# EAGLE board OLED Display-Panel (EAGLE 9.6.2), part 1 of 4
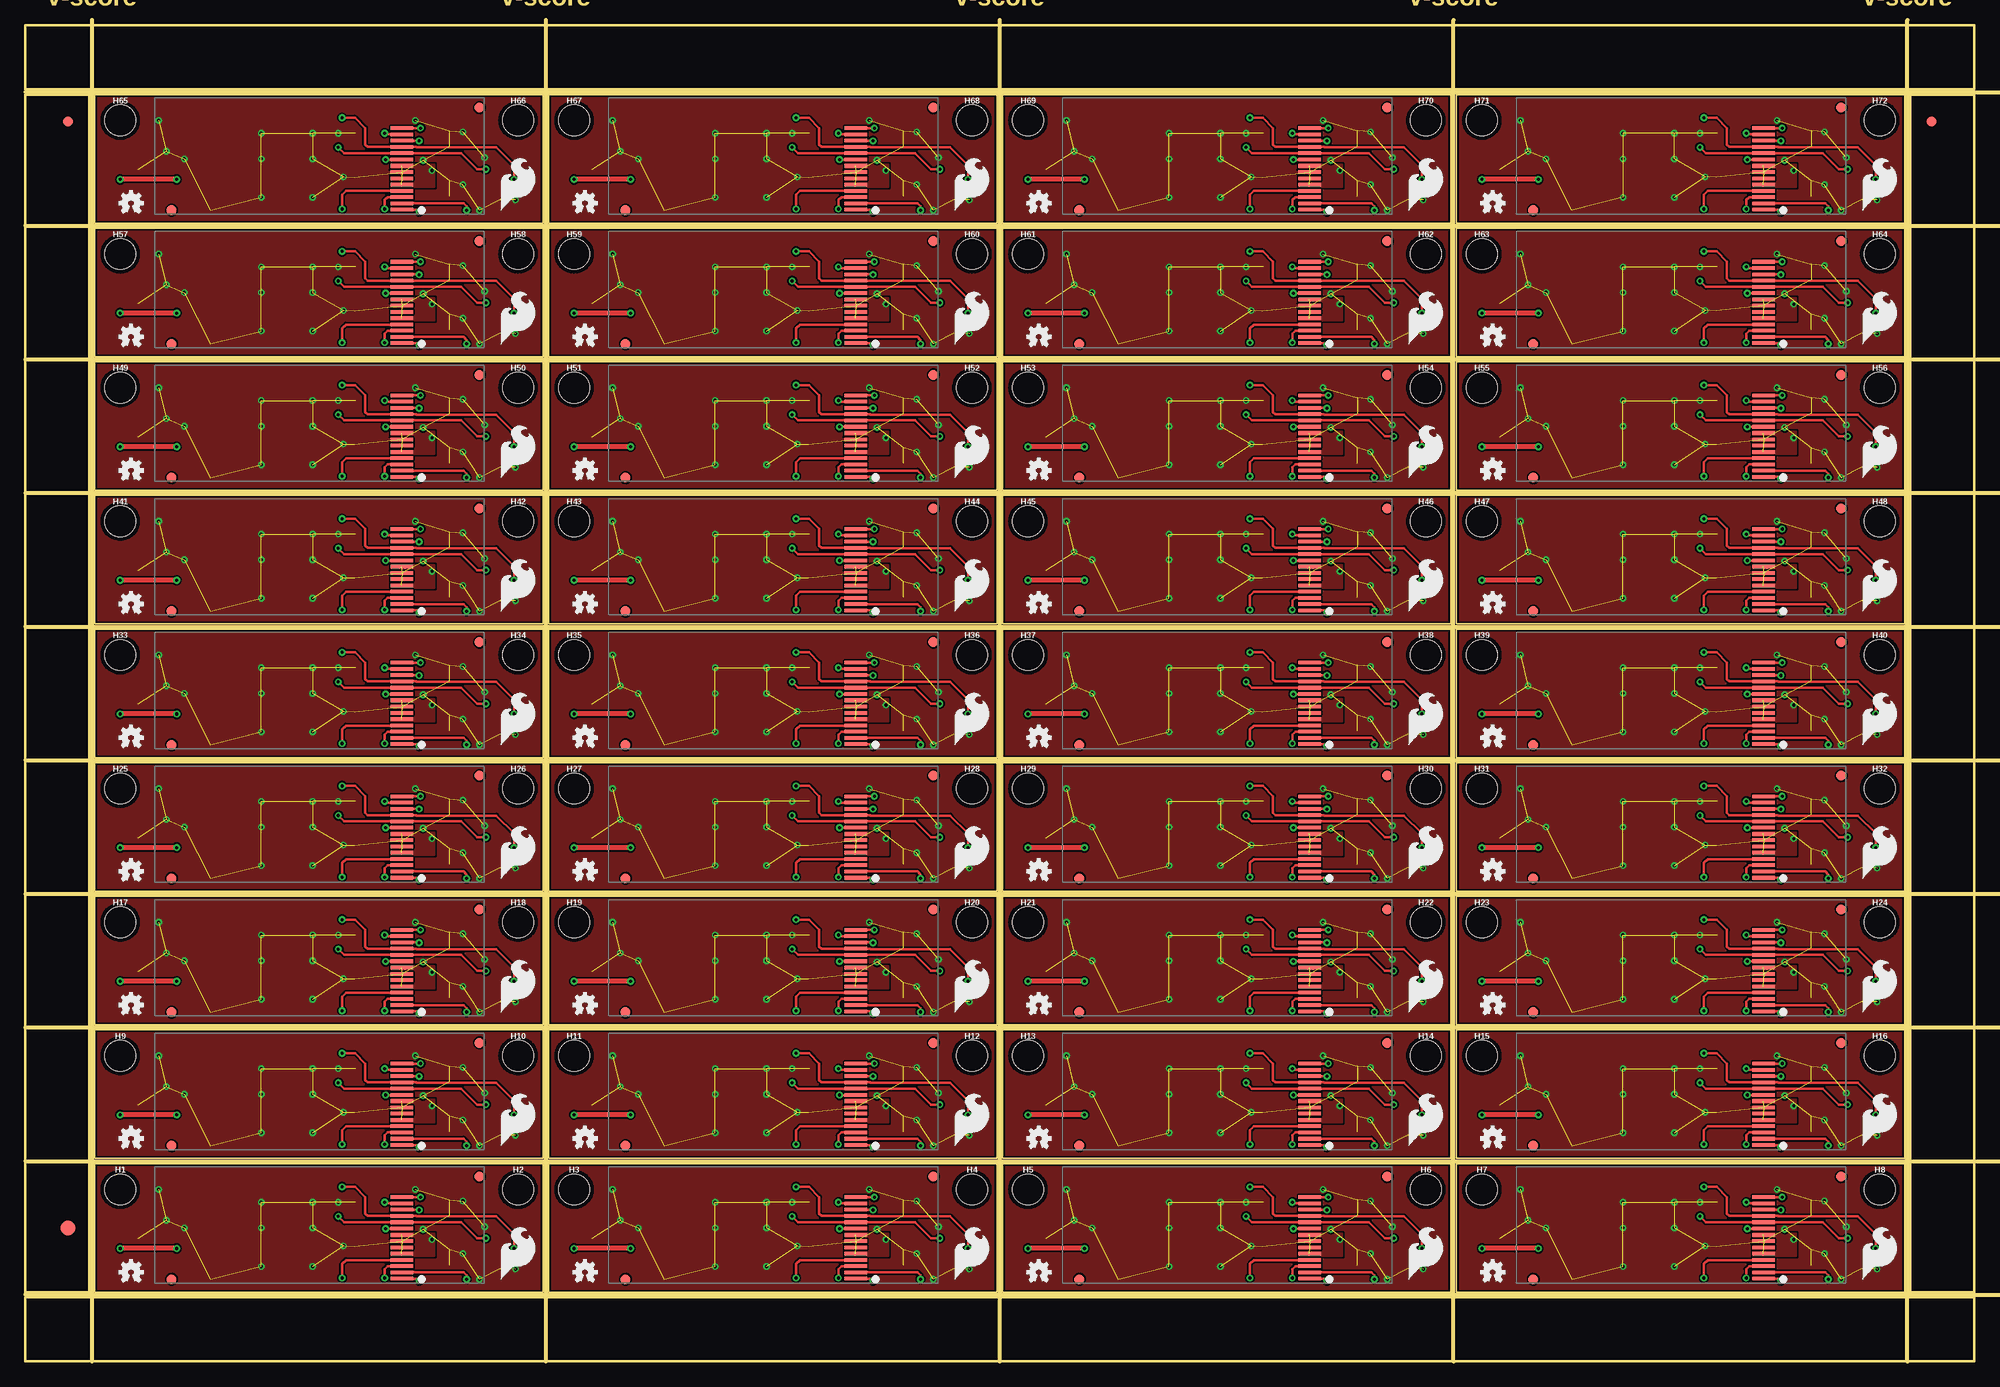
[diagram p0: board, top side]
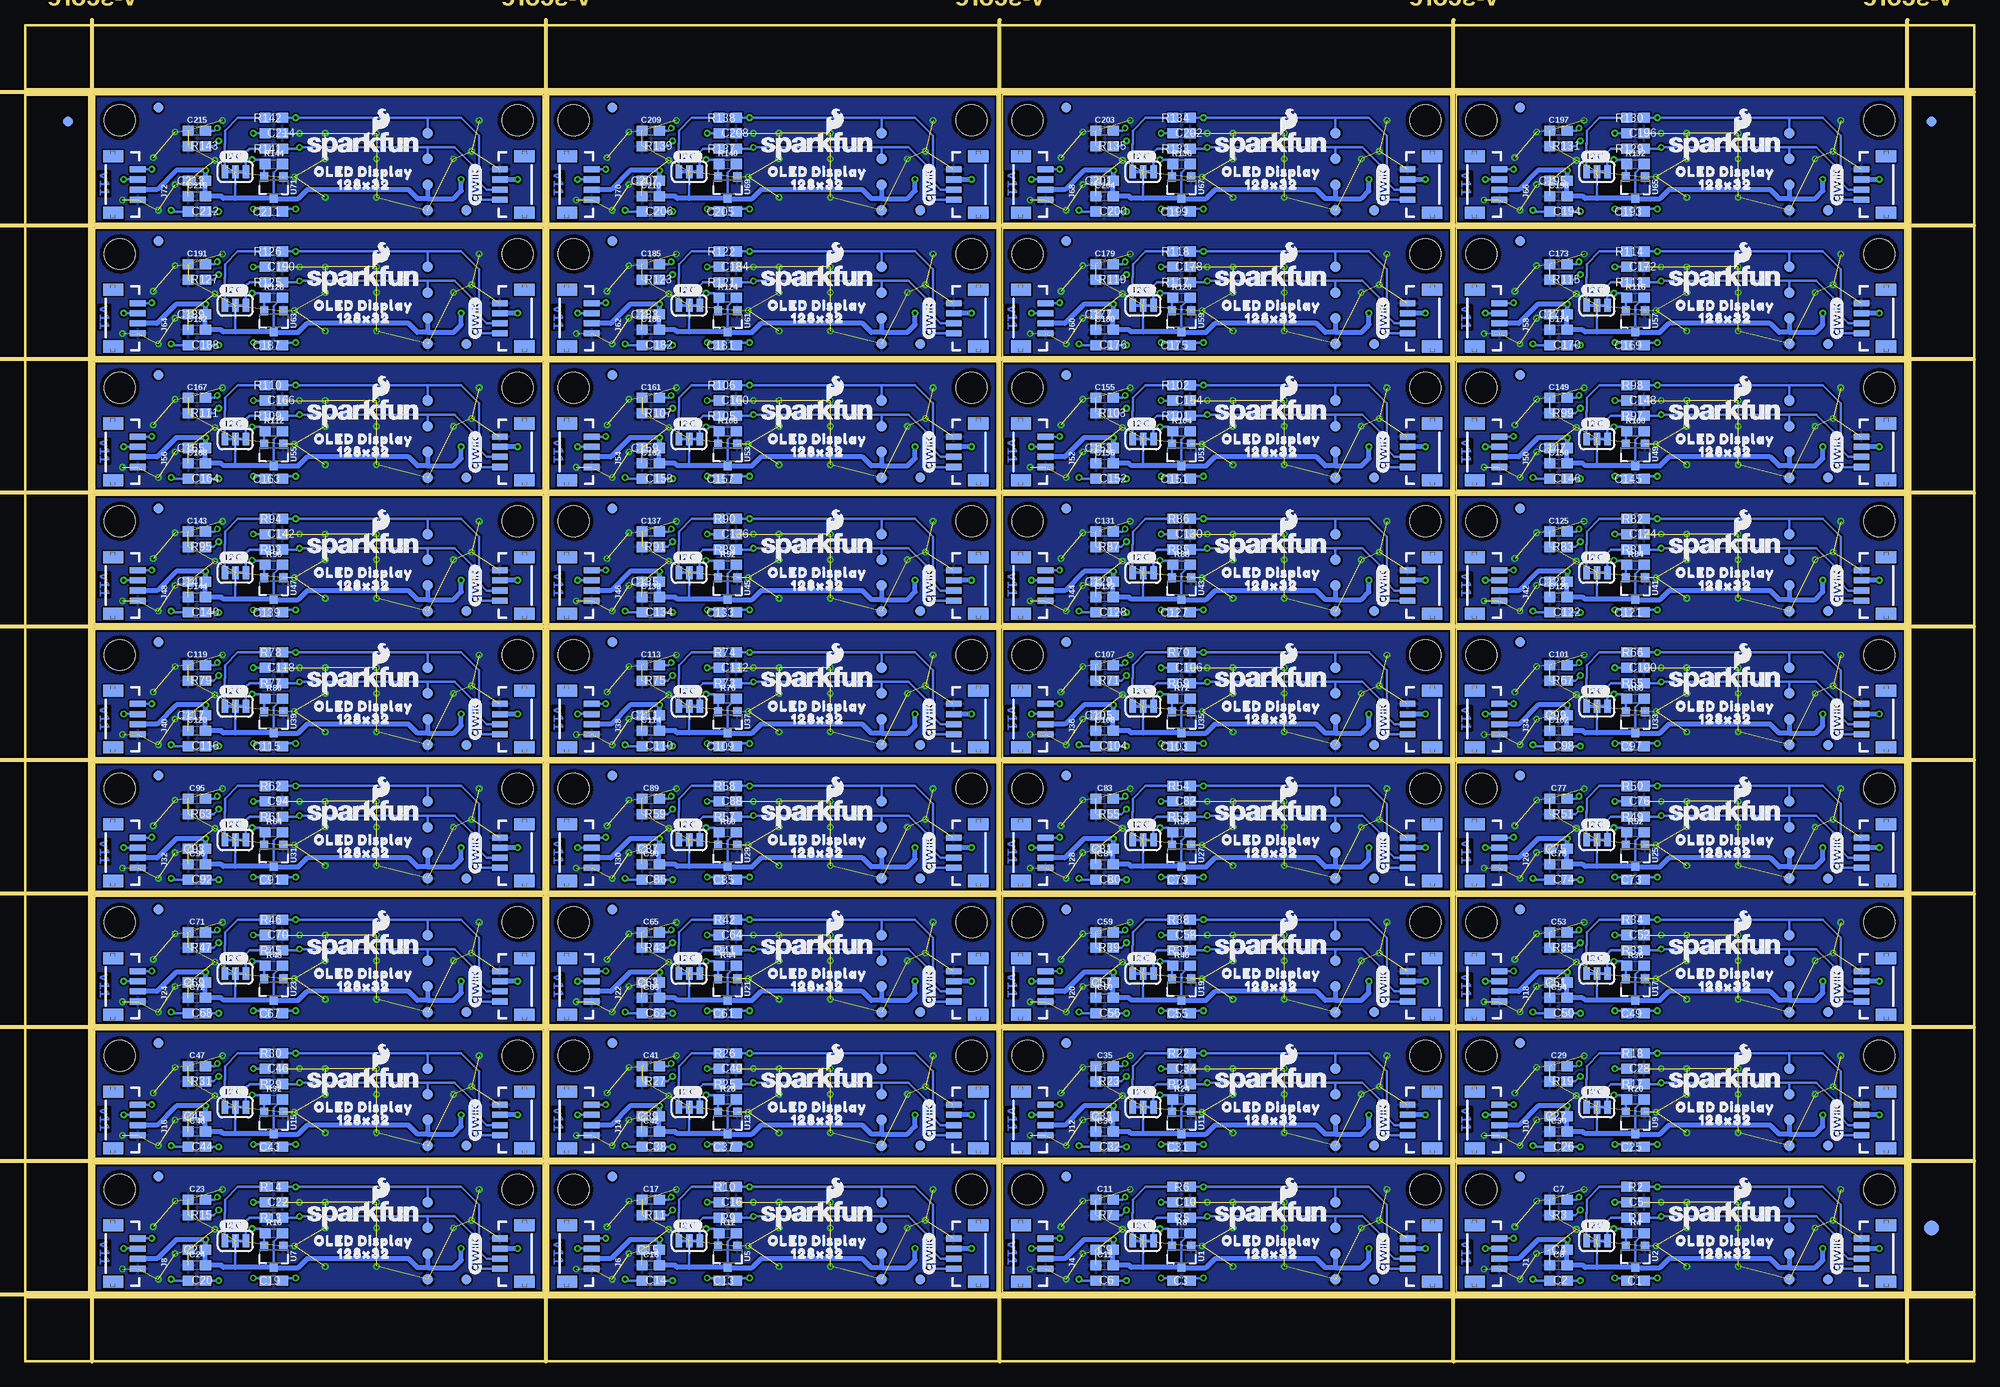
[diagram p1: board, bottom side, seen from below]

Size 192.89 x 132.21 mm. Coordinates in mm from the lower left corner, seen from the top.
Outline: 6.86,6.86 51.27,6.86 51.27,19.57 6.86,19.57 6.86,6.86
Outline: 51.78,6.86 96.19,6.86 96.19,19.57 51.78,19.57 51.78,6.86
Outline: 96.7,6.86 141.11,6.86 141.11,19.57 96.7,19.57 96.7,6.86
Outline: 141.62,6.86 186.03,6.86 186.03,19.57 141.62,19.57 141.62,6.86
Outline: 6.86,20.08 51.27,20.08 51.27,32.8 6.86,32.8 6.86,20.08
Outline: 51.78,20.08 96.19,20.08 96.19,32.8 51.78,32.8 51.78,20.08
Outline: 96.7,20.08 141.11,20.08 141.11,32.8 96.7,32.8 96.7,20.08
Outline: 141.62,20.08 186.03,20.08 186.03,32.8 141.62,32.8 141.62,20.08
Outline: 6.86,33.3 51.27,33.3 51.27,46.02 6.86,46.02 6.86,33.3
Outline: 51.78,33.3 96.19,33.3 96.19,46.02 51.78,46.02 51.78,33.3
Outline: 96.7,33.3 141.11,33.3 141.11,46.02 96.7,46.02 96.7,33.3
Outline: 141.62,33.3 186.03,33.3 186.03,46.02 141.62,46.02 141.62,33.3
Outline: 6.86,46.52 51.27,46.52 51.27,59.24 6.86,59.24 6.86,46.52
Outline: 51.78,46.52 96.19,46.52 96.19,59.24 51.78,59.24 51.78,46.52
Outline: 96.7,46.52 141.11,46.52 141.11,59.24 96.7,59.24 96.7,46.52
Outline: 141.62,46.52 186.03,46.52 186.03,59.24 141.62,59.24 141.62,46.52
Outline: 6.86,59.75 51.27,59.75 51.27,72.46 6.86,72.46 6.86,59.75
Outline: 51.78,59.75 96.19,59.75 96.19,72.46 51.78,72.46 51.78,59.75
Outline: 96.7,59.75 141.11,59.75 141.11,72.46 96.7,72.46 96.7,59.75
Outline: 141.62,59.75 186.03,59.75 186.03,72.46 141.62,72.46 141.62,59.75
Outline: 6.86,72.97 51.27,72.97 51.27,85.68 6.86,85.68 6.86,72.97
Outline: 51.78,72.97 96.19,72.97 96.19,85.68 51.78,85.68 51.78,72.97
Outline: 96.7,72.97 141.11,72.97 141.11,85.68 96.7,85.68 96.7,72.97
Outline: 141.62,72.97 186.03,72.97 186.03,85.68 141.62,85.68 141.62,72.97
Outline: 6.86,86.19 51.27,86.19 51.27,98.9 6.86,98.9 6.86,86.19
Outline: 51.78,86.19 96.19,86.19 96.19,98.9 51.78,98.9 51.78,86.19
Outline: 96.7,86.19 141.11,86.19 141.11,98.9 96.7,98.9 96.7,86.19
Outline: 141.62,86.19 186.03,86.19 186.03,98.9 141.62,98.9 141.62,86.19
Outline: 6.86,99.41 51.27,99.41 51.27,112.13 6.86,112.13 6.86,99.41
Outline: 51.78,99.41 96.19,99.41 96.19,112.13 51.78,112.13 51.78,99.41
Outline: 96.7,99.41 141.11,99.41 141.11,112.13 96.7,112.13 96.7,99.41
Outline: 141.62,99.41 186.03,99.41 186.03,112.13 141.62,112.13 141.62,99.41
Outline: 6.86,112.63 51.27,112.63 51.27,125.35 6.86,125.35 6.86,112.63
Outline: 51.78,112.63 96.19,112.63 96.19,125.35 51.78,125.35 51.78,112.63
Outline: 96.7,112.63 141.11,112.63 141.11,125.35 96.7,125.35 96.7,112.63
Outline: 141.62,112.63 186.03,112.63 186.03,125.35 141.62,125.35 141.62,112.63
Outline: 0,6.35 192.89,6.35 192.89,0 0,0 0,6.35
Outline: 186.54,125.35 192.89,125.35 192.89,6.86 186.54,6.86 186.54,125.35
Outline: 0,132.21 192.89,132.21 192.89,125.86 0,125.86 0,132.21
Outline: 0,125.35 6.35,125.35 6.35,6.86 0,6.86 0,125.35
Copper layers (1*16): Top 0.035mm / dielectric 1.5mm / Bottom 0.035mm
Design rules "OLED Display": minimum track width 7mil, minimum drill 0.3mm, track to track 7mil, track to pad 7mil, pad to pad 7mil, via to via 7mil, smd to smd 7mil, copper to edge 7mil, drill to drill 7mil, minimum pad ring 7mil, minimum via ring 7mil, stop-mask expansion 3mil, vias tented up to drill 25mil, thermal gap 10mil
Milling: 15 lines

## Footprints (pad centres in the part's own frame; a part is rotated, then mirrored left to right if it is on the bottom)
0603 = smd 1.1 x 1: 1 -0.85,0; 2 0.85,0
FIDUCIAL-1X2 = smd 1 x 1: 1 0,0
FIDUCIAL-1.5X3 = smd 1.5 x 1.5: 1 0,0
STAND-OFF-TIGHT = hole 3.048: 0,0
SMT-JUMPER_3_2-NC_TRACE_SILK = smd 0.66 x 1.27: 1 -1.041,0; 2 0,0; 3 1.041,0
JST04_1MM_VERT = smd 0.6 x 1.55: 1 -1.5,0.775; 2 -0.5,0.775; 3 0.5,0.775; 4 1.5,0.775 | smd 1.2 x 2: NC1 -2.8,3.2; NC2 2.8,3.2
PAD.03X.04 = smd 1.016 x 1.016: 1 0,0
SOT23-3 = smd 0.8 x 0.9: 1 -0.95,-1; 2 0.95,-1; 3 0,1.1
AMO091-12832BFG02-H14 = smd 2.2 x 0.35: 1 -0.066,-3.746; 2 -0.066,-3.126; 3 -0.066,-2.506; 4 -0.066,-1.886; 5 -0.066,-1.266; 6 -0.066,-0.646; 7 -0.066,-0.026; 8 -0.066,0.594; 9 -0.066,1.214; 10 -0.066,1.834; 11 -0.066,2.454; 12 -0.066,3.074; 13 -0.066,3.694; 14 -0.066,4.314

## Placement (x,y rotation side)
C1  1.0uF  [0603]  33.53,8 180 bottom
C2  1.0uF  [0603]  41.15,8 0 bottom
C3  1.0uF  [0603]  78.45,8 180 bottom
C4  0.1uF  [0603]  41.15,11.05 180 bottom
C5  2.2uF  [0603]  33.53,15.75 0 bottom
C6  1.0uF  [0603]  86.07,8 0 bottom
C7  4.7uF  [0603]  41.15,16 0 bottom
C8  4.7uF  [0603]  41.15,9.52 0 bottom
C9  0.1uF  [0603]  86.07,11.05 180 bottom
C10  2.2uF  [0603]  78.45,15.75 0 bottom
C11  4.7uF  [0603]  86.07,16 0 bottom
C12  4.7uF  [0603]  86.07,9.52 0 bottom
C13  1.0uF  [0603]  123.37,8 180 bottom
C14  1.0uF  [0603]  130.99,8 0 bottom
C15  0.1uF  [0603]  130.99,11.05 180 bottom
C16  2.2uF  [0603]  123.37,15.75 0 bottom
C17  4.7uF  [0603]  130.99,16 0 bottom
C18  4.7uF  [0603]  130.99,9.52 0 bottom
C19  1.0uF  [0603]  168.29,8 180 bottom
C20  1.0uF  [0603]  175.91,8 0 bottom
C21  0.1uF  [0603]  175.91,11.05 180 bottom
C22  2.2uF  [0603]  168.29,15.75 0 bottom
C23  4.7uF  [0603]  175.91,16 0 bottom
C24  4.7uF  [0603]  175.91,9.52 0 bottom
C25  1.0uF  [0603]  33.53,21.22 180 bottom
C26  1.0uF  [0603]  41.15,21.22 0 bottom
C27  0.1uF  [0603]  41.15,24.27 180 bottom
C28  2.2uF  [0603]  33.53,28.97 0 bottom
C29  4.7uF  [0603]  41.15,29.23 0 bottom
C30  4.7uF  [0603]  41.15,22.75 0 bottom
C31  1.0uF  [0603]  78.45,21.22 180 bottom
C32  1.0uF  [0603]  86.07,21.22 0 bottom
C33  0.1uF  [0603]  86.07,24.27 180 bottom
C34  2.2uF  [0603]  78.45,28.97 0 bottom
C35  4.7uF  [0603]  86.07,29.23 0 bottom
C36  4.7uF  [0603]  86.07,22.75 0 bottom
C37  1.0uF  [0603]  123.37,21.22 180 bottom
C38  1.0uF  [0603]  130.99,21.22 0 bottom
C39  0.1uF  [0603]  130.99,24.27 180 bottom
C40  2.2uF  [0603]  123.37,28.97 0 bottom
C41  4.7uF  [0603]  130.99,29.23 0 bottom
C42  4.7uF  [0603]  130.99,22.75 0 bottom
C43  1.0uF  [0603]  168.29,21.22 180 bottom
C44  1.0uF  [0603]  175.91,21.22 0 bottom
C45  0.1uF  [0603]  175.91,24.27 180 bottom
C46  2.2uF  [0603]  168.29,28.97 0 bottom
C47  4.7uF  [0603]  175.91,29.23 0 bottom
C48  4.7uF  [0603]  175.91,22.75 0 bottom
C49  1.0uF  [0603]  33.53,34.44 180 bottom
C50  1.0uF  [0603]  41.15,34.44 0 bottom
C51  0.1uF  [0603]  41.15,37.49 180 bottom
C52  2.2uF  [0603]  33.53,42.19 0 bottom
C53  4.7uF  [0603]  41.15,42.45 0 bottom
C54  4.7uF  [0603]  41.15,35.97 0 bottom
C55  1.0uF  [0603]  78.45,34.44 180 bottom
C56  1.0uF  [0603]  86.07,34.44 0 bottom
C57  0.1uF  [0603]  86.07,37.49 180 bottom
C58  2.2uF  [0603]  78.45,42.19 0 bottom
C59  4.7uF  [0603]  86.07,42.45 0 bottom
C60  4.7uF  [0603]  86.07,35.97 0 bottom
C61  1.0uF  [0603]  123.37,34.44 180 bottom
C62  1.0uF  [0603]  130.99,34.44 0 bottom
C63  0.1uF  [0603]  130.99,37.49 180 bottom
C64  2.2uF  [0603]  123.37,42.19 0 bottom
C65  4.7uF  [0603]  130.99,42.45 0 bottom
C66  4.7uF  [0603]  130.99,35.97 0 bottom
C67  1.0uF  [0603]  168.29,34.44 180 bottom
C68  1.0uF  [0603]  175.91,34.44 0 bottom
C69  0.1uF  [0603]  175.91,37.49 180 bottom
C70  2.2uF  [0603]  168.29,42.19 0 bottom
C71  4.7uF  [0603]  175.91,42.45 0 bottom
C72  4.7uF  [0603]  175.91,35.97 0 bottom
C73  1.0uF  [0603]  33.53,47.67 180 bottom
C74  1.0uF  [0603]  41.15,47.67 0 bottom
C75  0.1uF  [0603]  41.15,50.72 180 bottom
C76  2.2uF  [0603]  33.53,55.42 0 bottom
C77  4.7uF  [0603]  41.15,55.67 0 bottom
C78  4.7uF  [0603]  41.15,49.19 0 bottom
C79  1.0uF  [0603]  78.45,47.67 180 bottom
C80  1.0uF  [0603]  86.07,47.67 0 bottom
C81  0.1uF  [0603]  86.07,50.72 180 bottom
C82  2.2uF  [0603]  78.45,55.42 0 bottom
C83  4.7uF  [0603]  86.07,55.67 0 bottom
C84  4.7uF  [0603]  86.07,49.19 0 bottom
C85  1.0uF  [0603]  123.37,47.67 180 bottom
C86  1.0uF  [0603]  130.99,47.67 0 bottom
C87  0.1uF  [0603]  130.99,50.72 180 bottom
C88  2.2uF  [0603]  123.37,55.42 0 bottom
C89  4.7uF  [0603]  130.99,55.67 0 bottom
C90  4.7uF  [0603]  130.99,49.19 0 bottom
C91  1.0uF  [0603]  168.29,47.67 180 bottom
C92  1.0uF  [0603]  175.91,47.67 0 bottom
C93  0.1uF  [0603]  175.91,50.72 180 bottom
C94  2.2uF  [0603]  168.29,55.42 0 bottom
C95  4.7uF  [0603]  175.91,55.67 0 bottom
C96  4.7uF  [0603]  175.91,49.19 0 bottom
C97  1.0uF  [0603]  33.53,60.89 180 bottom
C98  1.0uF  [0603]  41.15,60.89 0 bottom
C99  0.1uF  [0603]  41.15,63.94 180 bottom
C100  2.2uF  [0603]  33.53,68.64 0 bottom
C101  4.7uF  [0603]  41.15,68.89 0 bottom
C102  4.7uF  [0603]  41.15,62.41 0 bottom
C103  1.0uF  [0603]  78.45,60.89 180 bottom
C104  1.0uF  [0603]  86.07,60.89 0 bottom
C105  0.1uF  [0603]  86.07,63.94 180 bottom
C106  2.2uF  [0603]  78.45,68.64 0 bottom
C107  4.7uF  [0603]  86.07,68.89 0 bottom
C108  4.7uF  [0603]  86.07,62.41 0 bottom
C109  1.0uF  [0603]  123.37,60.89 180 bottom
C110  1.0uF  [0603]  130.99,60.89 0 bottom
C111  0.1uF  [0603]  130.99,63.94 180 bottom
C112  2.2uF  [0603]  123.37,68.64 0 bottom
C113  4.7uF  [0603]  130.99,68.89 0 bottom
C114  4.7uF  [0603]  130.99,62.41 0 bottom
C115  1.0uF  [0603]  168.29,60.89 180 bottom
C116  1.0uF  [0603]  175.91,60.89 0 bottom
C117  0.1uF  [0603]  175.91,63.94 180 bottom
C118  2.2uF  [0603]  168.29,68.64 0 bottom
C119  4.7uF  [0603]  175.91,68.89 0 bottom
C120  4.7uF  [0603]  175.91,62.41 0 bottom
C121  1.0uF  [0603]  33.53,74.11 180 bottom
C122  1.0uF  [0603]  41.15,74.11 0 bottom
C123  0.1uF  [0603]  41.15,77.16 180 bottom
C124  2.2uF  [0603]  33.53,81.86 0 bottom
C125  4.7uF  [0603]  41.15,82.11 0 bottom
C126  4.7uF  [0603]  41.15,75.64 0 bottom
C127  1.0uF  [0603]  78.45,74.11 180 bottom
C128  1.0uF  [0603]  86.07,74.11 0 bottom
C129  0.1uF  [0603]  86.07,77.16 180 bottom
C130  2.2uF  [0603]  78.45,81.86 0 bottom
C131  4.7uF  [0603]  86.07,82.11 0 bottom
C132  4.7uF  [0603]  86.07,75.64 0 bottom
C133  1.0uF  [0603]  123.37,74.11 180 bottom
C134  1.0uF  [0603]  130.99,74.11 0 bottom
C135  0.1uF  [0603]  130.99,77.16 180 bottom
C136  2.2uF  [0603]  123.37,81.86 0 bottom
C137  4.7uF  [0603]  130.99,82.11 0 bottom
C138  4.7uF  [0603]  130.99,75.64 0 bottom
C139  1.0uF  [0603]  168.29,74.11 180 bottom
C140  1.0uF  [0603]  175.91,74.11 0 bottom
C141  0.1uF  [0603]  175.91,77.16 180 bottom
C142  2.2uF  [0603]  168.29,81.86 0 bottom
C143  4.7uF  [0603]  175.91,82.11 0 bottom
C144  4.7uF  [0603]  175.91,75.64 0 bottom
C145  1.0uF  [0603]  33.53,87.33 180 bottom
C146  1.0uF  [0603]  41.15,87.33 0 bottom
C147  0.1uF  [0603]  41.15,90.38 180 bottom
C148  2.2uF  [0603]  33.53,95.08 0 bottom
C149  4.7uF  [0603]  41.15,95.33 0 bottom
C150  4.7uF  [0603]  41.15,88.86 0 bottom
C151  1.0uF  [0603]  78.45,87.33 180 bottom
C152  1.0uF  [0603]  86.07,87.33 0 bottom
C153  0.1uF  [0603]  86.07,90.38 180 bottom
C154  2.2uF  [0603]  78.45,95.08 0 bottom
C155  4.7uF  [0603]  86.07,95.33 0 bottom
C156  4.7uF  [0603]  86.07,88.86 0 bottom
C157  1.0uF  [0603]  123.37,87.33 180 bottom
C158  1.0uF  [0603]  130.99,87.33 0 bottom
C159  0.1uF  [0603]  130.99,90.38 180 bottom
C160  2.2uF  [0603]  123.37,95.08 0 bottom
C161  4.7uF  [0603]  130.99,95.33 0 bottom
C162  4.7uF  [0603]  130.99,88.86 0 bottom
C163  1.0uF  [0603]  168.29,87.33 180 bottom
C164  1.0uF  [0603]  175.91,87.33 0 bottom
C165  0.1uF  [0603]  175.91,90.38 180 bottom
C166  2.2uF  [0603]  168.29,95.08 0 bottom
C167  4.7uF  [0603]  175.91,95.33 0 bottom
C168  4.7uF  [0603]  175.91,88.86 0 bottom
C169  1.0uF  [0603]  33.53,100.56 180 bottom
C170  1.0uF  [0603]  41.15,100.56 0 bottom
C171  0.1uF  [0603]  41.15,103.6 180 bottom
C172  2.2uF  [0603]  33.53,108.3 0 bottom
C173  4.7uF  [0603]  41.15,108.56 0 bottom
C174  4.7uF  [0603]  41.15,102.08 0 bottom
C175  1.0uF  [0603]  78.45,100.56 180 bottom
C176  1.0uF  [0603]  86.07,100.56 0 bottom
C177  0.1uF  [0603]  86.07,103.6 180 bottom
C178  2.2uF  [0603]  78.45,108.3 0 bottom
C179  4.7uF  [0603]  86.07,108.56 0 bottom
C180  4.7uF  [0603]  86.07,102.08 0 bottom
C181  1.0uF  [0603]  123.37,100.56 180 bottom
C182  1.0uF  [0603]  130.99,100.56 0 bottom
C183  0.1uF  [0603]  130.99,103.6 180 bottom
C184  2.2uF  [0603]  123.37,108.3 0 bottom
C185  4.7uF  [0603]  130.99,108.56 0 bottom
C186  4.7uF  [0603]  130.99,102.08 0 bottom
C187  1.0uF  [0603]  168.29,100.56 180 bottom
C188  1.0uF  [0603]  175.91,100.56 0 bottom
C189  0.1uF  [0603]  175.91,103.6 180 bottom
C190  2.2uF  [0603]  168.29,108.3 0 bottom
C191  4.7uF  [0603]  175.91,108.56 0 bottom
C192  4.7uF  [0603]  175.91,102.08 0 bottom
C193  1.0uF  [0603]  33.53,113.78 180 bottom
C194  1.0uF  [0603]  41.15,113.78 0 bottom
C195  0.1uF  [0603]  41.15,116.82 180 bottom
C196  2.2uF  [0603]  33.53,121.52 0 bottom
C197  4.7uF  [0603]  41.15,121.78 0 bottom
C198  4.7uF  [0603]  41.15,115.3 0 bottom
C199  1.0uF  [0603]  78.45,113.78 180 bottom
C200  1.0uF  [0603]  86.07,113.78 0 bottom
C201  0.1uF  [0603]  86.07,116.82 180 bottom
C202  2.2uF  [0603]  78.45,121.52 0 bottom
C203  4.7uF  [0603]  86.07,121.78 0 bottom
C204  4.7uF  [0603]  86.07,115.3 0 bottom
C205  1.0uF  [0603]  123.37,113.78 180 bottom
C206  1.0uF  [0603]  130.99,113.78 0 bottom
C207  0.1uF  [0603]  130.99,116.82 180 bottom
C208  2.2uF  [0603]  123.37,121.52 0 bottom
C209  4.7uF  [0603]  130.99,121.78 0 bottom
C210  4.7uF  [0603]  130.99,115.3 0 bottom
C211  1.0uF  [0603]  168.29,113.78 180 bottom
C212  1.0uF  [0603]  175.91,113.78 0 bottom
C213  0.1uF  [0603]  175.91,116.82 180 bottom
C214  2.2uF  [0603]  168.29,121.52 0 bottom
C215  4.7uF  [0603]  175.91,121.78 0 bottom
C216  4.7uF  [0603]  175.91,115.3 0 bottom
E$1  [FIDUCIAL-1X2]  4.23,122.68 0 top
E$2  [FIDUCIAL-1X2]  4.23,122.68 0 bottom
E$3  [FIDUCIAL-1X2]  188.65,122.68 0 top
E$4  [FIDUCIAL-1X2]  188.65,122.68 0 bottom
E$5  [FIDUCIAL-1.5X3]  4.23,13.21 0 top
E$6  [FIDUCIAL-1.5X3]  4.23,13.21 0 bottom
FD1  FIDUCIAL1X2  [FIDUCIAL-1X2]  14.48,8.13 0 top
FD2  FIDUCIAL1X2  [FIDUCIAL-1X2]  14.48,8.13 0 bottom
FD3  FIDUCIAL1X2  [FIDUCIAL-1X2]  44.96,18.29 0 top
FD4  FIDUCIAL1X2  [FIDUCIAL-1X2]  44.96,18.29 0 bottom
FD5  FIDUCIAL1X2  [FIDUCIAL-1X2]  59.4,8.13 0 top
FD6  FIDUCIAL1X2  [FIDUCIAL-1X2]  59.4,8.13 0 bottom
FD7  FIDUCIAL1X2  [FIDUCIAL-1X2]  89.88,18.29 0 top
FD8  FIDUCIAL1X2  [FIDUCIAL-1X2]  89.88,18.29 0 bottom
FD9  FIDUCIAL1X2  [FIDUCIAL-1X2]  104.32,8.13 0 top
FD10  FIDUCIAL1X2  [FIDUCIAL-1X2]  104.32,8.13 0 bottom
FD11  FIDUCIAL1X2  [FIDUCIAL-1X2]  134.8,18.29 0 top
FD12  FIDUCIAL1X2  [FIDUCIAL-1X2]  134.8,18.29 0 bottom
FD13  FIDUCIAL1X2  [FIDUCIAL-1X2]  149.24,8.13 0 top
FD14  FIDUCIAL1X2  [FIDUCIAL-1X2]  149.24,8.13 0 bottom
FD15  FIDUCIAL1X2  [FIDUCIAL-1X2]  179.72,18.29 0 top
FD16  FIDUCIAL1X2  [FIDUCIAL-1X2]  179.72,18.29 0 bottom
FD17  FIDUCIAL1X2  [FIDUCIAL-1X2]  14.48,21.35 0 top
FD18  FIDUCIAL1X2  [FIDUCIAL-1X2]  14.48,21.35 0 bottom
FD19  FIDUCIAL1X2  [FIDUCIAL-1X2]  44.96,31.51 0 top
FD20  FIDUCIAL1X2  [FIDUCIAL-1X2]  44.96,31.51 0 bottom
FD21  FIDUCIAL1X2  [FIDUCIAL-1X2]  59.4,21.35 0 top
FD22  FIDUCIAL1X2  [FIDUCIAL-1X2]  59.4,21.35 0 bottom
FD23  FIDUCIAL1X2  [FIDUCIAL-1X2]  89.88,31.51 0 top
FD24  FIDUCIAL1X2  [FIDUCIAL-1X2]  89.88,31.51 0 bottom
FD25  FIDUCIAL1X2  [FIDUCIAL-1X2]  104.32,21.35 0 top
FD26  FIDUCIAL1X2  [FIDUCIAL-1X2]  104.32,21.35 0 bottom
FD27  FIDUCIAL1X2  [FIDUCIAL-1X2]  134.8,31.51 0 top
FD28  FIDUCIAL1X2  [FIDUCIAL-1X2]  134.8,31.51 0 bottom
FD29  FIDUCIAL1X2  [FIDUCIAL-1X2]  149.24,21.35 0 top
FD30  FIDUCIAL1X2  [FIDUCIAL-1X2]  149.24,21.35 0 bottom
FD31  FIDUCIAL1X2  [FIDUCIAL-1X2]  179.72,31.51 0 top
FD32  FIDUCIAL1X2  [FIDUCIAL-1X2]  179.72,31.51 0 bottom
FD33  FIDUCIAL1X2  [FIDUCIAL-1X2]  14.48,34.57 0 top
FD34  FIDUCIAL1X2  [FIDUCIAL-1X2]  14.48,34.57 0 bottom
FD35  FIDUCIAL1X2  [FIDUCIAL-1X2]  44.96,44.73 0 top
FD36  FIDUCIAL1X2  [FIDUCIAL-1X2]  44.96,44.73 0 bottom
FD37  FIDUCIAL1X2  [FIDUCIAL-1X2]  59.4,34.57 0 top
FD38  FIDUCIAL1X2  [FIDUCIAL-1X2]  59.4,34.57 0 bottom
FD39  FIDUCIAL1X2  [FIDUCIAL-1X2]  89.88,44.73 0 top
FD40  FIDUCIAL1X2  [FIDUCIAL-1X2]  89.88,44.73 0 bottom
FD41  FIDUCIAL1X2  [FIDUCIAL-1X2]  104.32,34.57 0 top
FD42  FIDUCIAL1X2  [FIDUCIAL-1X2]  104.32,34.57 0 bottom
FD43  FIDUCIAL1X2  [FIDUCIAL-1X2]  134.8,44.73 0 top
FD44  FIDUCIAL1X2  [FIDUCIAL-1X2]  134.8,44.73 0 bottom
FD45  FIDUCIAL1X2  [FIDUCIAL-1X2]  149.24,34.57 0 top
FD46  FIDUCIAL1X2  [FIDUCIAL-1X2]  149.24,34.57 0 bottom
FD47  FIDUCIAL1X2  [FIDUCIAL-1X2]  179.72,44.73 0 top
FD48  FIDUCIAL1X2  [FIDUCIAL-1X2]  179.72,44.73 0 bottom
FD49  FIDUCIAL1X2  [FIDUCIAL-1X2]  14.48,47.8 0 top
FD50  FIDUCIAL1X2  [FIDUCIAL-1X2]  14.48,47.8 0 bottom
FD51  FIDUCIAL1X2  [FIDUCIAL-1X2]  44.96,57.96 0 top
FD52  FIDUCIAL1X2  [FIDUCIAL-1X2]  44.96,57.96 0 bottom
FD53  FIDUCIAL1X2  [FIDUCIAL-1X2]  59.4,47.8 0 top
FD54  FIDUCIAL1X2  [FIDUCIAL-1X2]  59.4,47.8 0 bottom
FD55  FIDUCIAL1X2  [FIDUCIAL-1X2]  89.88,57.96 0 top
FD56  FIDUCIAL1X2  [FIDUCIAL-1X2]  89.88,57.96 0 bottom
FD57  FIDUCIAL1X2  [FIDUCIAL-1X2]  104.32,47.8 0 top
FD58  FIDUCIAL1X2  [FIDUCIAL-1X2]  104.32,47.8 0 bottom
FD59  FIDUCIAL1X2  [FIDUCIAL-1X2]  134.8,57.96 0 top
FD60  FIDUCIAL1X2  [FIDUCIAL-1X2]  134.8,57.96 0 bottom
FD61  FIDUCIAL1X2  [FIDUCIAL-1X2]  149.24,47.8 0 top
FD62  FIDUCIAL1X2  [FIDUCIAL-1X2]  149.24,47.8 0 bottom
FD63  FIDUCIAL1X2  [FIDUCIAL-1X2]  179.72,57.96 0 top
FD64  FIDUCIAL1X2  [FIDUCIAL-1X2]  179.72,57.96 0 bottom
FD65  FIDUCIAL1X2  [FIDUCIAL-1X2]  14.48,61.02 0 top
FD66  FIDUCIAL1X2  [FIDUCIAL-1X2]  14.48,61.02 0 bottom
FD67  FIDUCIAL1X2  [FIDUCIAL-1X2]  44.96,71.18 0 top
FD68  FIDUCIAL1X2  [FIDUCIAL-1X2]  44.96,71.18 0 bottom
FD69  FIDUCIAL1X2  [FIDUCIAL-1X2]  59.4,61.02 0 top
FD70  FIDUCIAL1X2  [FIDUCIAL-1X2]  59.4,61.02 0 bottom
FD71  FIDUCIAL1X2  [FIDUCIAL-1X2]  89.88,71.18 0 top
FD72  FIDUCIAL1X2  [FIDUCIAL-1X2]  89.88,71.18 0 bottom
FD73  FIDUCIAL1X2  [FIDUCIAL-1X2]  104.32,61.02 0 top
FD74  FIDUCIAL1X2  [FIDUCIAL-1X2]  104.32,61.02 0 bottom
FD75  FIDUCIAL1X2  [FIDUCIAL-1X2]  134.8,71.18 0 top
FD76  FIDUCIAL1X2  [FIDUCIAL-1X2]  134.8,71.18 0 bottom
FD77  FIDUCIAL1X2  [FIDUCIAL-1X2]  149.24,61.02 0 top
FD78  FIDUCIAL1X2  [FIDUCIAL-1X2]  149.24,61.02 0 bottom
FD79  FIDUCIAL1X2  [FIDUCIAL-1X2]  179.72,71.18 0 top
FD80  FIDUCIAL1X2  [FIDUCIAL-1X2]  179.72,71.18 0 bottom
FD81  FIDUCIAL1X2  [FIDUCIAL-1X2]  14.48,74.24 0 top
FD82  FIDUCIAL1X2  [FIDUCIAL-1X2]  14.48,74.24 0 bottom
FD83  FIDUCIAL1X2  [FIDUCIAL-1X2]  44.96,84.4 0 top
FD84  FIDUCIAL1X2  [FIDUCIAL-1X2]  44.96,84.4 0 bottom
FD85  FIDUCIAL1X2  [FIDUCIAL-1X2]  59.4,74.24 0 top
FD86  FIDUCIAL1X2  [FIDUCIAL-1X2]  59.4,74.24 0 bottom
FD87  FIDUCIAL1X2  [FIDUCIAL-1X2]  89.88,84.4 0 top
FD88  FIDUCIAL1X2  [FIDUCIAL-1X2]  89.88,84.4 0 bottom
FD89  FIDUCIAL1X2  [FIDUCIAL-1X2]  104.32,74.24 0 top
FD90  FIDUCIAL1X2  [FIDUCIAL-1X2]  104.32,74.24 0 bottom
FD91  FIDUCIAL1X2  [FIDUCIAL-1X2]  134.8,84.4 0 top
FD92  FIDUCIAL1X2  [FIDUCIAL-1X2]  134.8,84.4 0 bottom
FD93  FIDUCIAL1X2  [FIDUCIAL-1X2]  149.24,74.24 0 top
FD94  FIDUCIAL1X2  [FIDUCIAL-1X2]  149.24,74.24 0 bottom
FD95  FIDUCIAL1X2  [FIDUCIAL-1X2]  179.72,84.4 0 top
FD96  FIDUCIAL1X2  [FIDUCIAL-1X2]  179.72,84.4 0 bottom
FD97  FIDUCIAL1X2  [FIDUCIAL-1X2]  14.48,87.46 0 top
FD98  FIDUCIAL1X2  [FIDUCIAL-1X2]  14.48,87.46 0 bottom
FD99  FIDUCIAL1X2  [FIDUCIAL-1X2]  44.96,97.62 0 top
FD100  FIDUCIAL1X2  [FIDUCIAL-1X2]  44.96,97.62 0 bottom
FD101  FIDUCIAL1X2  [FIDUCIAL-1X2]  59.4,87.46 0 top
FD102  FIDUCIAL1X2  [FIDUCIAL-1X2]  59.4,87.46 0 bottom
FD103  FIDUCIAL1X2  [FIDUCIAL-1X2]  89.88,97.62 0 top
FD104  FIDUCIAL1X2  [FIDUCIAL-1X2]  89.88,97.62 0 bottom
FD105  FIDUCIAL1X2  [FIDUCIAL-1X2]  104.32,87.46 0 top
FD106  FIDUCIAL1X2  [FIDUCIAL-1X2]  104.32,87.46 0 bottom
FD107  FIDUCIAL1X2  [FIDUCIAL-1X2]  134.8,97.62 0 top
FD108  FIDUCIAL1X2  [FIDUCIAL-1X2]  134.8,97.62 0 bottom
FD109  FIDUCIAL1X2  [FIDUCIAL-1X2]  149.24,87.46 0 top
FD110  FIDUCIAL1X2  [FIDUCIAL-1X2]  149.24,87.46 0 bottom
FD111  FIDUCIAL1X2  [FIDUCIAL-1X2]  179.72,97.62 0 top
FD112  FIDUCIAL1X2  [FIDUCIAL-1X2]  179.72,97.62 0 bottom
FD113  FIDUCIAL1X2  [FIDUCIAL-1X2]  14.48,100.68 0 top
FD114  FIDUCIAL1X2  [FIDUCIAL-1X2]  14.48,100.68 0 bottom
FD115  FIDUCIAL1X2  [FIDUCIAL-1X2]  44.96,110.84 0 top
FD116  FIDUCIAL1X2  [FIDUCIAL-1X2]  44.96,110.84 0 bottom
FD117  FIDUCIAL1X2  [FIDUCIAL-1X2]  59.4,100.68 0 top
FD118  FIDUCIAL1X2  [FIDUCIAL-1X2]  59.4,100.68 0 bottom
FD119  FIDUCIAL1X2  [FIDUCIAL-1X2]  89.88,110.84 0 top
FD120  FIDUCIAL1X2  [FIDUCIAL-1X2]  89.88,110.84 0 bottom
FD121  FIDUCIAL1X2  [FIDUCIAL-1X2]  104.32,100.68 0 top
FD122  FIDUCIAL1X2  [FIDUCIAL-1X2]  104.32,100.68 0 bottom
FD123  FIDUCIAL1X2  [FIDUCIAL-1X2]  134.8,110.84 0 top
FD124  FIDUCIAL1X2  [FIDUCIAL-1X2]  134.8,110.84 0 bottom
FD125  FIDUCIAL1X2  [FIDUCIAL-1X2]  149.24,100.68 0 top
FD126  FIDUCIAL1X2  [FIDUCIAL-1X2]  149.24,100.68 0 bottom
FD127  FIDUCIAL1X2  [FIDUCIAL-1X2]  179.72,110.84 0 top
FD128  FIDUCIAL1X2  [FIDUCIAL-1X2]  179.72,110.84 0 bottom
FD129  FIDUCIAL1X2  [FIDUCIAL-1X2]  14.48,113.9 0 top
FD130  FIDUCIAL1X2  [FIDUCIAL-1X2]  14.48,113.9 0 bottom
FD131  FIDUCIAL1X2  [FIDUCIAL-1X2]  44.96,124.06 0 top
FD132  FIDUCIAL1X2  [FIDUCIAL-1X2]  44.96,124.06 0 bottom
FD133  FIDUCIAL1X2  [FIDUCIAL-1X2]  59.4,113.9 0 top
FD134  FIDUCIAL1X2  [FIDUCIAL-1X2]  59.4,113.9 0 bottom
FD135  FIDUCIAL1X2  [FIDUCIAL-1X2]  89.88,124.06 0 top
FD136  FIDUCIAL1X2  [FIDUCIAL-1X2]  89.88,124.06 0 bottom
FD137  FIDUCIAL1X2  [FIDUCIAL-1X2]  104.32,113.9 0 top
FD138  FIDUCIAL1X2  [FIDUCIAL-1X2]  104.32,113.9 0 bottom
FD139  FIDUCIAL1X2  [FIDUCIAL-1X2]  134.8,124.06 0 top
FD140  FIDUCIAL1X2  [FIDUCIAL-1X2]  134.8,124.06 0 bottom
FD141  FIDUCIAL1X2  [FIDUCIAL-1X2]  149.24,113.9 0 top
FD142  FIDUCIAL1X2  [FIDUCIAL-1X2]  149.24,113.9 0 bottom
FD143  FIDUCIAL1X2  [FIDUCIAL-1X2]  179.72,124.06 0 top
FD144  FIDUCIAL1X2  [FIDUCIAL-1X2]  179.72,124.06 0 bottom
H1  STAND-OFFTIGHT  [STAND-OFF-TIGHT]  9.4,17.02 0 top
H2  STAND-OFFTIGHT  [STAND-OFF-TIGHT]  48.77,17.02 0 top
H3  STAND-OFFTIGHT  [STAND-OFF-TIGHT]  54.32,17.02 0 top
H4  STAND-OFFTIGHT  [STAND-OFF-TIGHT]  93.69,17.02 0 top
H5  STAND-OFFTIGHT  [STAND-OFF-TIGHT]  99.24,17.02 0 top
H6  STAND-OFFTIGHT  [STAND-OFF-TIGHT]  138.61,17.02 0 top
H7  STAND-OFFTIGHT  [STAND-OFF-TIGHT]  144.16,17.02 0 top
H8  STAND-OFFTIGHT  [STAND-OFF-TIGHT]  183.53,17.02 0 top
H9  STAND-OFFTIGHT  [STAND-OFF-TIGHT]  9.4,30.24 0 top
H10  STAND-OFFTIGHT  [STAND-OFF-TIGHT]  48.77,30.24 0 top
H11  STAND-OFFTIGHT  [STAND-OFF-TIGHT]  54.32,30.24 0 top
H12  STAND-OFFTIGHT  [STAND-OFF-TIGHT]  93.69,30.24 0 top
H13  STAND-OFFTIGHT  [STAND-OFF-TIGHT]  99.24,30.24 0 top
H14  STAND-OFFTIGHT  [STAND-OFF-TIGHT]  138.61,30.24 0 top
H15  STAND-OFFTIGHT  [STAND-OFF-TIGHT]  144.16,30.24 0 top
H16  STAND-OFFTIGHT  [STAND-OFF-TIGHT]  183.53,30.24 0 top
H17  STAND-OFFTIGHT  [STAND-OFF-TIGHT]  9.4,43.46 0 top
H18  STAND-OFFTIGHT  [STAND-OFF-TIGHT]  48.77,43.46 0 top
H19  STAND-OFFTIGHT  [STAND-OFF-TIGHT]  54.32,43.46 0 top
H20  STAND-OFFTIGHT  [STAND-OFF-TIGHT]  93.69,43.46 0 top
H21  STAND-OFFTIGHT  [STAND-OFF-TIGHT]  99.24,43.46 0 top
H22  STAND-OFFTIGHT  [STAND-OFF-TIGHT]  138.61,43.46 0 top
H23  STAND-OFFTIGHT  [STAND-OFF-TIGHT]  144.16,43.46 0 top
H24  STAND-OFFTIGHT  [STAND-OFF-TIGHT]  183.53,43.46 0 top
H25  STAND-OFFTIGHT  [STAND-OFF-TIGHT]  9.4,56.69 0 top
H26  STAND-OFFTIGHT  [STAND-OFF-TIGHT]  48.77,56.69 0 top
H27  STAND-OFFTIGHT  [STAND-OFF-TIGHT]  54.32,56.69 0 top
H28  STAND-OFFTIGHT  [STAND-OFF-TIGHT]  93.69,56.69 0 top
H29  STAND-OFFTIGHT  [STAND-OFF-TIGHT]  99.24,56.69 0 top
H30  STAND-OFFTIGHT  [STAND-OFF-TIGHT]  138.61,56.69 0 top
H31  STAND-OFFTIGHT  [STAND-OFF-TIGHT]  144.16,56.69 0 top
H32  STAND-OFFTIGHT  [STAND-OFF-TIGHT]  183.53,56.69 0 top
H33  STAND-OFFTIGHT  [STAND-OFF-TIGHT]  9.4,69.91 0 top
H34  STAND-OFFTIGHT  [STAND-OFF-TIGHT]  48.77,69.91 0 top
H35  STAND-OFFTIGHT  [STAND-OFF-TIGHT]  54.32,69.91 0 top
H36  STAND-OFFTIGHT  [STAND-OFF-TIGHT]  93.69,69.91 0 top
H37  STAND-OFFTIGHT  [STAND-OFF-TIGHT]  99.24,69.91 0 top
H38  STAND-OFFTIGHT  [STAND-OFF-TIGHT]  138.61,69.91 0 top
H39  STAND-OFFTIGHT  [STAND-OFF-TIGHT]  144.16,69.91 0 top
H40  STAND-OFFTIGHT  [STAND-OFF-TIGHT]  183.53,69.91 0 top
H41  STAND-OFFTIGHT  [STAND-OFF-TIGHT]  9.4,83.13 0 top
H42  STAND-OFFTIGHT  [STAND-OFF-TIGHT]  48.77,83.13 0 top
H43  STAND-OFFTIGHT  [STAND-OFF-TIGHT]  54.32,83.13 0 top
H44  STAND-OFFTIGHT  [STAND-OFF-TIGHT]  93.69,83.13 0 top
H45  STAND-OFFTIGHT  [STAND-OFF-TIGHT]  99.24,83.13 0 top
H46  STAND-OFFTIGHT  [STAND-OFF-TIGHT]  138.61,83.13 0 top
H47  STAND-OFFTIGHT  [STAND-OFF-TIGHT]  144.16,83.13 0 top
H48  STAND-OFFTIGHT  [STAND-OFF-TIGHT]  183.53,83.13 0 top
H49  STAND-OFFTIGHT  [STAND-OFF-TIGHT]  9.4,96.35 0 top
H50  STAND-OFFTIGHT  [STAND-OFF-TIGHT]  48.77,96.35 0 top
H51  STAND-OFFTIGHT  [STAND-OFF-TIGHT]  54.32,96.35 0 top
H52  STAND-OFFTIGHT  [STAND-OFF-TIGHT]  93.69,96.35 0 top
H53  STAND-OFFTIGHT  [STAND-OFF-TIGHT]  99.24,96.35 0 top
H54  STAND-OFFTIGHT  [STAND-OFF-TIGHT]  138.61,96.35 0 top
H55  STAND-OFFTIGHT  [STAND-OFF-TIGHT]  144.16,96.35 0 top
H56  STAND-OFFTIGHT  [STAND-OFF-TIGHT]  183.53,96.35 0 top
H57  STAND-OFFTIGHT  [STAND-OFF-TIGHT]  9.4,109.57 0 top
H58  STAND-OFFTIGHT  [STAND-OFF-TIGHT]  48.77,109.57 0 top
H59  STAND-OFFTIGHT  [STAND-OFF-TIGHT]  54.32,109.57 0 top
H60  STAND-OFFTIGHT  [STAND-OFF-TIGHT]  93.69,109.57 0 top
H61  STAND-OFFTIGHT  [STAND-OFF-TIGHT]  99.24,109.57 0 top
H62  STAND-OFFTIGHT  [STAND-OFF-TIGHT]  138.61,109.57 0 top
H63  STAND-OFFTIGHT  [STAND-OFF-TIGHT]  144.16,109.57 0 top
H64  STAND-OFFTIGHT  [STAND-OFF-TIGHT]  183.53,109.57 0 top
H65  STAND-OFFTIGHT  [STAND-OFF-TIGHT]  9.4,122.79 0 top
H66  STAND-OFFTIGHT  [STAND-OFF-TIGHT]  48.77,122.79 0 top
H67  STAND-OFFTIGHT  [STAND-OFF-TIGHT]  54.32,122.79 0 top
H68  STAND-OFFTIGHT  [STAND-OFF-TIGHT]  93.69,122.79 0 top
H69  STAND-OFFTIGHT  [STAND-OFF-TIGHT]  99.24,122.79 0 top
H70  STAND-OFFTIGHT  [STAND-OFF-TIGHT]  138.61,122.79 0 top
H71  STAND-OFFTIGHT  [STAND-OFF-TIGHT]  144.16,122.79 0 top
H72  STAND-OFFTIGHT  [STAND-OFF-TIGHT]  183.53,122.79 0 top
I2C  JUMPER-SMT_3_2-NC_TRACE_SILK  [SMT-JUMPER_3_2-NC_TRACE_SILK]  37.34,11.94 0 bottom
I2C1  JUMPER-SMT_3_2-NC_TRACE_SILK  [SMT-JUMPER_3_2-NC_TRACE_SILK]  82.26,11.94 0 bottom
I2C2  JUMPER-SMT_3_2-NC_TRACE_SILK  [SMT-JUMPER_3_2-NC_TRACE_SILK]  127.18,11.94 0 bottom
I2C3  JUMPER-SMT_3_2-NC_TRACE_SILK  [SMT-JUMPER_3_2-NC_TRACE_SILK]  172.1,11.94 0 bottom
I2C4  JUMPER-SMT_3_2-NC_TRACE_SILK  [SMT-JUMPER_3_2-NC_TRACE_SILK]  37.34,25.16 0 bottom
I2C5  JUMPER-SMT_3_2-NC_TRACE_SILK  [SMT-JUMPER_3_2-NC_TRACE_SILK]  82.26,25.16 0 bottom
I2C6  JUMPER-SMT_3_2-NC_TRACE_SILK  [SMT-JUMPER_3_2-NC_TRACE_SILK]  127.18,25.16 0 bottom
I2C7  JUMPER-SMT_3_2-NC_TRACE_SILK  [SMT-JUMPER_3_2-NC_TRACE_SILK]  172.1,25.16 0 bottom
I2C8  JUMPER-SMT_3_2-NC_TRACE_SILK  [SMT-JUMPER_3_2-NC_TRACE_SILK]  37.34,38.38 0 bottom
I2C9  JUMPER-SMT_3_2-NC_TRACE_SILK  [SMT-JUMPER_3_2-NC_TRACE_SILK]  82.26,38.38 0 bottom
I2C10  JUMPER-SMT_3_2-NC_TRACE_SILK  [SMT-JUMPER_3_2-NC_TRACE_SILK]  127.18,38.38 0 bottom
I2C11  JUMPER-SMT_3_2-NC_TRACE_SILK  [SMT-JUMPER_3_2-NC_TRACE_SILK]  172.1,38.38 0 bottom
I2C12  JUMPER-SMT_3_2-NC_TRACE_SILK  [SMT-JUMPER_3_2-NC_TRACE_SILK]  37.34,51.61 0 bottom
I2C13  JUMPER-SMT_3_2-NC_TRACE_SILK  [SMT-JUMPER_3_2-NC_TRACE_SILK]  82.26,51.61 0 bottom
I2C14  JUMPER-SMT_3_2-NC_TRACE_SILK  [SMT-JUMPER_3_2-NC_TRACE_SILK]  127.18,51.61 0 bottom
I2C15  JUMPER-SMT_3_2-NC_TRACE_SILK  [SMT-JUMPER_3_2-NC_TRACE_SILK]  172.1,51.61 0 bottom
I2C16  JUMPER-SMT_3_2-NC_TRACE_SILK  [SMT-JUMPER_3_2-NC_TRACE_SILK]  37.34,64.83 0 bottom
I2C17  JUMPER-SMT_3_2-NC_TRACE_SILK  [SMT-JUMPER_3_2-NC_TRACE_SILK]  82.26,64.83 0 bottom
I2C18  JUMPER-SMT_3_2-NC_TRACE_SILK  [SMT-JUMPER_3_2-NC_TRACE_SILK]  127.18,64.83 0 bottom
I2C19  JUMPER-SMT_3_2-NC_TRACE_SILK  [SMT-JUMPER_3_2-NC_TRACE_SILK]  172.1,64.83 0 bottom
I2C20  JUMPER-SMT_3_2-NC_TRACE_SILK  [SMT-JUMPER_3_2-NC_TRACE_SILK]  37.34,78.05 0 bottom
I2C21  JUMPER-SMT_3_2-NC_TRACE_SILK  [SMT-JUMPER_3_2-NC_TRACE_SILK]  82.26,78.05 0 bottom
I2C22  JUMPER-SMT_3_2-NC_TRACE_SILK  [SMT-JUMPER_3_2-NC_TRACE_SILK]  127.18,78.05 0 bottom
I2C23  JUMPER-SMT_3_2-NC_TRACE_SILK  [SMT-JUMPER_3_2-NC_TRACE_SILK]  172.1,78.05 0 bottom
I2C24  JUMPER-SMT_3_2-NC_TRACE_SILK  [SMT-JUMPER_3_2-NC_TRACE_SILK]  37.34,91.27 0 bottom
I2C25  JUMPER-SMT_3_2-NC_TRACE_SILK  [SMT-JUMPER_3_2-NC_TRACE_SILK]  82.26,91.27 0 bottom
I2C26  JUMPER-SMT_3_2-NC_TRACE_SILK  [SMT-JUMPER_3_2-NC_TRACE_SILK]  127.18,91.27 0 bottom
I2C27  JUMPER-SMT_3_2-NC_TRACE_SILK  [SMT-JUMPER_3_2-NC_TRACE_SILK]  172.1,91.27 0 bottom
I2C28  JUMPER-SMT_3_2-NC_TRACE_SILK  [SMT-JUMPER_3_2-NC_TRACE_SILK]  37.34,104.49 0 bottom
I2C29  JUMPER-SMT_3_2-NC_TRACE_SILK  [SMT-JUMPER_3_2-NC_TRACE_SILK]  82.26,104.49 0 bottom
I2C30  JUMPER-SMT_3_2-NC_TRACE_SILK  [SMT-JUMPER_3_2-NC_TRACE_SILK]  127.18,104.49 0 bottom
I2C31  JUMPER-SMT_3_2-NC_TRACE_SILK  [SMT-JUMPER_3_2-NC_TRACE_SILK]  172.1,104.49 0 bottom
I2C32  JUMPER-SMT_3_2-NC_TRACE_SILK  [SMT-JUMPER_3_2-NC_TRACE_SILK]  37.34,117.71 0 bottom
I2C33  JUMPER-SMT_3_2-NC_TRACE_SILK  [SMT-JUMPER_3_2-NC_TRACE_SILK]  82.26,117.71 0 bottom
I2C34  JUMPER-SMT_3_2-NC_TRACE_SILK  [SMT-JUMPER_3_2-NC_TRACE_SILK]  127.18,117.71 0 bottom
I2C35  JUMPER-SMT_3_2-NC_TRACE_SILK  [SMT-JUMPER_3_2-NC_TRACE_SILK]  172.1,117.71 0 bottom
J1  Vertical Qwiic Connector  [JST04_1MM_VERT]  46.23,10.67 90 bottom
J2  Vertical Qwiic Connector  [JST04_1MM_VERT]  56.86,10.67 270 bottom
J3  Vertical Qwiic Connector  [JST04_1MM_VERT]  11.94,10.67 270 bottom
J4  Vertical Qwiic Connector  [JST04_1MM_VERT]  91.15,10.67 90 bottom
J5  Vertical Qwiic Connector  [JST04_1MM_VERT]  101.78,10.67 270 bottom
J6  Vertical Qwiic Connector  [JST04_1MM_VERT]  136.07,10.67 90 bottom
J7  Vertical Qwiic Connector  [JST04_1MM_VERT]  146.7,10.67 270 bottom
J8  Vertical Qwiic Connector  [JST04_1MM_VERT]  180.99,10.67 90 bottom
J9  Vertical Qwiic Connector  [JST04_1MM_VERT]  11.94,23.89 270 bottom
J10  Vertical Qwiic Connector  [JST04_1MM_VERT]  46.23,23.89 90 bottom
J11  Vertical Qwiic Connector  [JST04_1MM_VERT]  56.86,23.89 270 bottom
J12  Vertical Qwiic Connector  [JST04_1MM_VERT]  91.15,23.89 90 bottom
J13  Vertical Qwiic Connector  [JST04_1MM_VERT]  101.78,23.89 270 bottom
J14  Vertical Qwiic Connector  [JST04_1MM_VERT]  136.07,23.89 90 bottom
J15  Vertical Qwiic Connector  [JST04_1MM_VERT]  146.7,23.89 270 bottom
J16  Vertical Qwiic Connector  [JST04_1MM_VERT]  180.99,23.89 90 bottom
J17  Vertical Qwiic Connector  [JST04_1MM_VERT]  11.94,37.11 270 bottom
J18  Vertical Qwiic Connector  [JST04_1MM_VERT]  46.23,37.11 90 bottom
J19  Vertical Qwiic Connector  [JST04_1MM_VERT]  56.86,37.11 270 bottom
J20  Vertical Qwiic Connector  [JST04_1MM_VERT]  91.15,37.11 90 bottom
J21  Vertical Qwiic Connector  [JST04_1MM_VERT]  101.78,37.11 270 bottom
J22  Vertical Qwiic Connector  [JST04_1MM_VERT]  136.07,37.11 90 bottom
J23  Vertical Qwiic Connector  [JST04_1MM_VERT]  146.7,37.11 270 bottom
J24  Vertical Qwiic Connector  [JST04_1MM_VERT]  180.99,37.11 90 bottom
J25  Vertical Qwiic Connector  [JST04_1MM_VERT]  11.94,50.34 270 bottom
J26  Vertical Qwiic Connector  [JST04_1MM_VERT]  46.23,50.34 90 bottom
J27  Vertical Qwiic Connector  [JST04_1MM_VERT]  56.86,50.34 270 bottom
J28  Vertical Qwiic Connector  [JST04_1MM_VERT]  91.15,50.34 90 bottom
J29  Vertical Qwiic Connector  [JST04_1MM_VERT]  101.78,50.34 270 bottom
J30  Vertical Qwiic Connector  [JST04_1MM_VERT]  136.07,50.34 90 bottom
J31  Vertical Qwiic Connector  [JST04_1MM_VERT]  146.7,50.34 270 bottom
J32  Vertical Qwiic Connector  [JST04_1MM_VERT]  180.99,50.34 90 bottom
J33  Vertical Qwiic Connector  [JST04_1MM_VERT]  11.94,63.56 270 bottom
J34  Vertical Qwiic Connector  [JST04_1MM_VERT]  46.23,63.56 90 bottom
J35  Vertical Qwiic Connector  [JST04_1MM_VERT]  56.86,63.56 270 bottom
J36  Vertical Qwiic Connector  [JST04_1MM_VERT]  91.15,63.56 90 bottom
J37  Vertical Qwiic Connector  [JST04_1MM_VERT]  101.78,63.56 270 bottom
J38  Vertical Qwiic Connector  [JST04_1MM_VERT]  136.07,63.56 90 bottom
J39  Vertical Qwiic Connector  [JST04_1MM_VERT]  146.7,63.56 270 bottom
J40  Vertical Qwiic Connector  [JST04_1MM_VERT]  180.99,63.56 90 bottom
J41  Vertical Qwiic Connector  [JST04_1MM_VERT]  11.94,76.78 270 bottom
J42  Vertical Qwiic Connector  [JST04_1MM_VERT]  46.23,76.78 90 bottom
J43  Vertical Qwiic Connector  [JST04_1MM_VERT]  56.86,76.78 270 bottom
J44  Vertical Qwiic Connector  [JST04_1MM_VERT]  91.15,76.78 90 bottom
J45  Vertical Qwiic Connector  [JST04_1MM_VERT]  101.78,76.78 270 bottom
J46  Vertical Qwiic Connector  [JST04_1MM_VERT]  136.07,76.78 90 bottom
J47  Vertical Qwiic Connector  [JST04_1MM_VERT]  146.7,76.78 270 bottom
J48  Vertical Qwiic Connector  [JST04_1MM_VERT]  180.99,76.78 90 bottom
J49  Vertical Qwiic Connector  [JST04_1MM_VERT]  11.94,90 270 bottom
J50  Vertical Qwiic Connector  [JST04_1MM_VERT]  46.23,90 90 bottom
J51  Vertical Qwiic Connector  [JST04_1MM_VERT]  56.86,90 270 bottom
J52  Vertical Qwiic Connector  [JST04_1MM_VERT]  91.15,90 90 bottom
J53  Vertical Qwiic Connector  [JST04_1MM_VERT]  101.78,90 270 bottom
J54  Vertical Qwiic Connector  [JST04_1MM_VERT]  136.07,90 90 bottom
J55  Vertical Qwiic Connector  [JST04_1MM_VERT]  146.7,90 270 bottom
J56  Vertical Qwiic Connector  [JST04_1MM_VERT]  180.99,90 90 bottom
J57  Vertical Qwiic Connector  [JST04_1MM_VERT]  11.94,103.22 270 bottom
J58  Vertical Qwiic Connector  [JST04_1MM_VERT]  46.23,103.22 90 bottom
J59  Vertical Qwiic Connector  [JST04_1MM_VERT]  56.86,103.22 270 bottom
J60  Vertical Qwiic Connector  [JST04_1MM_VERT]  91.15,103.22 90 bottom
J61  Vertical Qwiic Connector  [JST04_1MM_VERT]  101.78,103.22 270 bottom
J62  Vertical Qwiic Connector  [JST04_1MM_VERT]  136.07,103.22 90 bottom
J63  Vertical Qwiic Connector  [JST04_1MM_VERT]  146.7,103.22 270 bottom
J64  Vertical Qwiic Connector  [JST04_1MM_VERT]  180.99,103.22 90 bottom
J65  Vertical Qwiic Connector  [JST04_1MM_VERT]  11.94,116.44 270 bottom
J66  Vertical Qwiic Connector  [JST04_1MM_VERT]  46.23,116.44 90 bottom
J67  Vertical Qwiic Connector  [JST04_1MM_VERT]  56.86,116.44 270 bottom
J68  Vertical Qwiic Connector  [JST04_1MM_VERT]  91.15,116.44 90 bottom
J69  Vertical Qwiic Connector  [JST04_1MM_VERT]  101.78,116.44 270 bottom
J70  Vertical Qwiic Connector  [JST04_1MM_VERT]  136.07,116.44 90 bottom
J71  Vertical Qwiic Connector  [JST04_1MM_VERT]  146.7,116.44 270 bottom
J72  Vertical Qwiic Connector  [JST04_1MM_VERT]  180.99,116.44 90 bottom
LOGO1  SFE_LOGO_NAME_FLAME.1_INCH  [SFE_LOGO_NAME_FLAME_.1]  24.64,14.48 0 bottom
LOGO2  OSHW-LOGOMINI  [OSHW-LOGO-MINI]  10.46,8.84 0 top
LOGO3  QWIIC_LOGO_4MM  [QWIIC_4MM]  13.59,10.67 90 bottom
LOGO4  OSHW-LOGOMINI  [OSHW-LOGO-MINI]  55.38,8.84 0 top
LOGO5  QWIIC_LOGO_4MM  [QWIIC_4MM]  58.51,10.67 90 bottom
LOGO6  SFE_LOGO_NAME_FLAME.1_INCH  [SFE_LOGO_NAME_FLAME_.1]  69.56,14.48 0 bottom
LOGO7  OSHW-LOGOMINI  [OSHW-LOGO-MINI]  100.3,8.84 0 top
LOGO8  QWIIC_LOGO_4MM  [QWIIC_4MM]  103.43,10.67 90 bottom
LOGO9  SFE_LOGO_NAME_FLAME.1_INCH  [SFE_LOGO_NAME_FLAME_.1]  114.48,14.48 0 bottom
LOGO10  OSHW-LOGOMINI  [OSHW-LOGO-MINI]  145.22,8.84 0 top
LOGO11  QWIIC_LOGO_4MM  [QWIIC_4MM]  148.35,10.67 90 bottom
LOGO12  SFE_LOGO_NAME_FLAME.1_INCH  [SFE_LOGO_NAME_FLAME_.1]  159.4,14.48 0 bottom
LOGO13  OSHW-LOGOMINI  [OSHW-LOGO-MINI]  10.46,22.06 0 top
LOGO14  QWIIC_LOGO_4MM  [QWIIC_4MM]  13.59,23.89 90 bottom
LOGO15  SFE_LOGO_NAME_FLAME.1_INCH  [SFE_LOGO_NAME_FLAME_.1]  24.64,27.7 0 bottom
LOGO16  OSHW-LOGOMINI  [OSHW-LOGO-MINI]  55.38,22.06 0 top
LOGO17  QWIIC_LOGO_4MM  [QWIIC_4MM]  58.51,23.89 90 bottom
LOGO18  SFE_LOGO_NAME_FLAME.1_INCH  [SFE_LOGO_NAME_FLAME_.1]  69.56,27.7 0 bottom
LOGO19  OSHW-LOGOMINI  [OSHW-LOGO-MINI]  100.3,22.06 0 top
LOGO20  QWIIC_LOGO_4MM  [QWIIC_4MM]  103.43,23.89 90 bottom
LOGO21  SFE_LOGO_NAME_FLAME.1_INCH  [SFE_LOGO_NAME_FLAME_.1]  114.48,27.7 0 bottom
LOGO22  OSHW-LOGOMINI  [OSHW-LOGO-MINI]  145.22,22.06 0 top
LOGO23  QWIIC_LOGO_4MM  [QWIIC_4MM]  148.35,23.89 90 bottom
LOGO24  SFE_LOGO_NAME_FLAME.1_INCH  [SFE_LOGO_NAME_FLAME_.1]  159.4,27.7 0 bottom
LOGO25  OSHW-LOGOMINI  [OSHW-LOGO-MINI]  10.46,35.28 0 top
LOGO26  QWIIC_LOGO_4MM  [QWIIC_4MM]  13.59,37.11 90 bottom
LOGO27  SFE_LOGO_NAME_FLAME.1_INCH  [SFE_LOGO_NAME_FLAME_.1]  24.64,40.92 0 bottom
LOGO28  OSHW-LOGOMINI  [OSHW-LOGO-MINI]  55.38,35.28 0 top
LOGO29  QWIIC_LOGO_4MM  [QWIIC_4MM]  58.51,37.11 90 bottom
LOGO30  SFE_LOGO_NAME_FLAME.1_INCH  [SFE_LOGO_NAME_FLAME_.1]  69.56,40.92 0 bottom
LOGO31  OSHW-LOGOMINI  [OSHW-LOGO-MINI]  100.3,35.28 0 top
LOGO32  QWIIC_LOGO_4MM  [QWIIC_4MM]  103.43,37.11 90 bottom
LOGO33  SFE_LOGO_NAME_FLAME.1_INCH  [SFE_LOGO_NAME_FLAME_.1]  114.48,40.92 0 bottom
LOGO34  OSHW-LOGOMINI  [OSHW-LOGO-MINI]  145.22,35.28 0 top
LOGO35  QWIIC_LOGO_4MM  [QWIIC_4MM]  148.35,37.11 90 bottom
LOGO36  SFE_LOGO_NAME_FLAME.1_INCH  [SFE_LOGO_NAME_FLAME_.1]  159.4,40.92 0 bottom
LOGO37  OSHW-LOGOMINI  [OSHW-LOGO-MINI]  10.46,48.51 0 top
LOGO38  QWIIC_LOGO_4MM  [QWIIC_4MM]  13.59,50.34 90 bottom
LOGO39  SFE_LOGO_NAME_FLAME.1_INCH  [SFE_LOGO_NAME_FLAME_.1]  24.64,54.15 0 bottom
LOGO40  OSHW-LOGOMINI  [OSHW-LOGO-MINI]  55.38,48.51 0 top
LOGO41  QWIIC_LOGO_4MM  [QWIIC_4MM]  58.51,50.34 90 bottom
LOGO42  SFE_LOGO_NAME_FLAME.1_INCH  [SFE_LOGO_NAME_FLAME_.1]  69.56,54.15 0 bottom
LOGO43  OSHW-LOGOMINI  [OSHW-LOGO-MINI]  100.3,48.51 0 top
LOGO44  QWIIC_LOGO_4MM  [QWIIC_4MM]  103.43,50.34 90 bottom
LOGO45  SFE_LOGO_NAME_FLAME.1_INCH  [SFE_LOGO_NAME_FLAME_.1]  114.48,54.15 0 bottom
LOGO46  OSHW-LOGOMINI  [OSHW-LOGO-MINI]  145.22,48.51 0 top
LOGO47  QWIIC_LOGO_4MM  [QWIIC_4MM]  148.35,50.34 90 bottom
LOGO48  SFE_LOGO_NAME_FLAME.1_INCH  [SFE_LOGO_NAME_FLAME_.1]  159.4,54.15 0 bottom
LOGO49  OSHW-LOGOMINI  [OSHW-LOGO-MINI]  10.46,61.73 0 top
LOGO50  QWIIC_LOGO_4MM  [QWIIC_4MM]  13.59,63.56 90 bottom
LOGO51  SFE_LOGO_NAME_FLAME.1_INCH  [SFE_LOGO_NAME_FLAME_.1]  24.64,67.37 0 bottom
LOGO52  OSHW-LOGOMINI  [OSHW-LOGO-MINI]  55.38,61.73 0 top
LOGO53  QWIIC_LOGO_4MM  [QWIIC_4MM]  58.51,63.56 90 bottom
LOGO54  SFE_LOGO_NAME_FLAME.1_INCH  [SFE_LOGO_NAME_FLAME_.1]  69.56,67.37 0 bottom
LOGO55  OSHW-LOGOMINI  [OSHW-LOGO-MINI]  100.3,61.73 0 top
LOGO56  QWIIC_LOGO_4MM  [QWIIC_4MM]  103.43,63.56 90 bottom
LOGO57  SFE_LOGO_NAME_FLAME.1_INCH  [SFE_LOGO_NAME_FLAME_.1]  114.48,67.37 0 bottom
LOGO58  OSHW-LOGOMINI  [OSHW-LOGO-MINI]  145.22,61.73 0 top
LOGO59  QWIIC_LOGO_4MM  [QWIIC_4MM]  148.35,63.56 90 bottom
LOGO60  SFE_LOGO_NAME_FLAME.1_INCH  [SFE_LOGO_NAME_FLAME_.1]  159.4,67.37 0 bottom
LOGO61  OSHW-LOGOMINI  [OSHW-LOGO-MINI]  10.46,74.95 0 top
LOGO62  QWIIC_LOGO_4MM  [QWIIC_4MM]  13.59,76.78 90 bottom
LOGO63  SFE_LOGO_NAME_FLAME.1_INCH  [SFE_LOGO_NAME_FLAME_.1]  24.64,80.59 0 bottom
LOGO64  OSHW-LOGOMINI  [OSHW-LOGO-MINI]  55.38,74.95 0 top
LOGO65  QWIIC_LOGO_4MM  [QWIIC_4MM]  58.51,76.78 90 bottom
LOGO66  SFE_LOGO_NAME_FLAME.1_INCH  [SFE_LOGO_NAME_FLAME_.1]  69.56,80.59 0 bottom
LOGO67  OSHW-LOGOMINI  [OSHW-LOGO-MINI]  100.3,74.95 0 top
LOGO68  QWIIC_LOGO_4MM  [QWIIC_4MM]  103.43,76.78 90 bottom
LOGO69  SFE_LOGO_NAME_FLAME.1_INCH  [SFE_LOGO_NAME_FLAME_.1]  114.48,80.59 0 bottom
LOGO70  OSHW-LOGOMINI  [OSHW-LOGO-MINI]  145.22,74.95 0 top
LOGO71  QWIIC_LOGO_4MM  [QWIIC_4MM]  148.35,76.78 90 bottom
LOGO72  SFE_LOGO_NAME_FLAME.1_INCH  [SFE_LOGO_NAME_FLAME_.1]  159.4,80.59 0 bottom
LOGO73  OSHW-LOGOMINI  [OSHW-LOGO-MINI]  10.46,88.17 0 top
LOGO74  QWIIC_LOGO_4MM  [QWIIC_4MM]  13.59,90 90 bottom
LOGO75  SFE_LOGO_NAME_FLAME.1_INCH  [SFE_LOGO_NAME_FLAME_.1]  24.64,93.81 0 bottom
LOGO76  OSHW-LOGOMINI  [OSHW-LOGO-MINI]  55.38,88.17 0 top
LOGO77  QWIIC_LOGO_4MM  [QWIIC_4MM]  58.51,90 90 bottom
LOGO78  SFE_LOGO_NAME_FLAME.1_INCH  [SFE_LOGO_NAME_FLAME_.1]  69.56,93.81 0 bottom
LOGO79  OSHW-LOGOMINI  [OSHW-LOGO-MINI]  100.3,88.17 0 top
LOGO80  QWIIC_LOGO_4MM  [QWIIC_4MM]  103.43,90 90 bottom
LOGO81  SFE_LOGO_NAME_FLAME.1_INCH  [SFE_LOGO_NAME_FLAME_.1]  114.48,93.81 0 bottom
LOGO82  OSHW-LOGOMINI  [OSHW-LOGO-MINI]  145.22,88.17 0 top
LOGO83  QWIIC_LOGO_4MM  [QWIIC_4MM]  148.35,90 90 bottom
LOGO84  SFE_LOGO_NAME_FLAME.1_INCH  [SFE_LOGO_NAME_FLAME_.1]  159.4,93.81 0 bottom
LOGO85  OSHW-LOGOMINI  [OSHW-LOGO-MINI]  10.46,101.39 0 top
LOGO86  QWIIC_LOGO_4MM  [QWIIC_4MM]  13.59,103.22 90 bottom
LOGO87  SFE_LOGO_NAME_FLAME.1_INCH  [SFE_LOGO_NAME_FLAME_.1]  24.64,107.03 0 bottom
LOGO88  OSHW-LOGOMINI  [OSHW-LOGO-MINI]  55.38,101.39 0 top
LOGO89  QWIIC_LOGO_4MM  [QWIIC_4MM]  58.51,103.22 90 bottom
LOGO90  SFE_LOGO_NAME_FLAME.1_INCH  [SFE_LOGO_NAME_FLAME_.1]  69.56,107.03 0 bottom
LOGO91  OSHW-LOGOMINI  [OSHW-LOGO-MINI]  100.3,101.39 0 top
LOGO92  QWIIC_LOGO_4MM  [QWIIC_4MM]  103.43,103.22 90 bottom
LOGO93  SFE_LOGO_NAME_FLAME.1_INCH  [SFE_LOGO_NAME_FLAME_.1]  114.48,107.03 0 bottom
LOGO94  OSHW-LOGOMINI  [OSHW-LOGO-MINI]  145.22,101.39 0 top
LOGO95  QWIIC_LOGO_4MM  [QWIIC_4MM]  148.35,103.22 90 bottom
LOGO96  SFE_LOGO_NAME_FLAME.1_INCH  [SFE_LOGO_NAME_FLAME_.1]  159.4,107.03 0 bottom
LOGO97  OSHW-LOGOMINI  [OSHW-LOGO-MINI]  10.46,114.61 0 top
LOGO98  QWIIC_LOGO_4MM  [QWIIC_4MM]  13.59,116.44 90 bottom
LOGO99  SFE_LOGO_NAME_FLAME.1_INCH  [SFE_LOGO_NAME_FLAME_.1]  24.64,120.25 0 bottom
LOGO100  OSHW-LOGOMINI  [OSHW-LOGO-MINI]  55.38,114.61 0 top
LOGO101  QWIIC_LOGO_4MM  [QWIIC_4MM]  58.51,116.44 90 bottom
LOGO102  SFE_LOGO_NAME_FLAME.1_INCH  [SFE_LOGO_NAME_FLAME_.1]  69.56,120.25 0 bottom
LOGO103  OSHW-LOGOMINI  [OSHW-LOGO-MINI]  100.3,114.61 0 top
LOGO104  QWIIC_LOGO_4MM  [QWIIC_4MM]  103.43,116.44 90 bottom
LOGO105  SFE_LOGO_NAME_FLAME.1_INCH  [SFE_LOGO_NAME_FLAME_.1]  114.48,120.25 0 bottom
LOGO106  OSHW-LOGOMINI  [OSHW-LOGO-MINI]  145.22,114.61 0 top
LOGO107  QWIIC_LOGO_4MM  [QWIIC_4MM]  148.35,116.44 90 bottom
LOGO108  SFE_LOGO_NAME_FLAME.1_INCH  [SFE_LOGO_NAME_FLAME_.1]  159.4,120.25 0 bottom
R1  4.7k  [0603]  33.53,14.22 180 bottom
R2  4.7k  [0603]  33.53,17.27 180 bottom
R3  470k  [0603]  41.15,14.48 0 bottom
R4  10k  [0603]  33.53,12.7 0 bottom
R5  4.7k  [0603]  78.45,14.22 180 bottom
R6  4.7k  [0603]  78.45,17.27 180 bottom
R7  470k  [0603]  86.07,14.48 0 bottom
R8  10k  [0603]  78.45,12.7 0 bottom
R9  4.7k  [0603]  123.37,14.22 180 bottom
R10  4.7k  [0603]  123.37,17.27 180 bottom
R11  470k  [0603]  130.99,14.48 0 bottom
R12  10k  [0603]  123.37,12.7 0 bottom
R13  4.7k  [0603]  168.29,14.22 180 bottom
R14  4.7k  [0603]  168.29,17.27 180 bottom
R15  470k  [0603]  175.91,14.48 0 bottom
R16  10k  [0603]  168.29,12.7 0 bottom
R17  4.7k  [0603]  33.53,27.45 180 bottom
R18  4.7k  [0603]  33.53,30.5 180 bottom
R19  470k  [0603]  41.15,27.7 0 bottom
R20  10k  [0603]  33.53,25.92 0 bottom
R21  4.7k  [0603]  78.45,27.45 180 bottom
R22  4.7k  [0603]  78.45,30.5 180 bottom
R23  470k  [0603]  86.07,27.7 0 bottom
R24  10k  [0603]  78.45,25.92 0 bottom
R25  4.7k  [0603]  123.37,27.45 180 bottom
R26  4.7k  [0603]  123.37,30.5 180 bottom
R27  470k  [0603]  130.99,27.7 0 bottom
R28  10k  [0603]  123.37,25.92 0 bottom
R29  4.7k  [0603]  168.29,27.45 180 bottom
R30  4.7k  [0603]  168.29,30.5 180 bottom
R31  470k  [0603]  175.91,27.7 0 bottom
R32  10k  [0603]  168.29,25.92 0 bottom
R33  4.7k  [0603]  33.53,40.67 180 bottom
R34  4.7k  [0603]  33.53,43.72 180 bottom
R35  470k  [0603]  41.15,40.92 0 bottom
R36  10k  [0603]  33.53,39.14 0 bottom
R37  4.7k  [0603]  78.45,40.67 180 bottom
R38  4.7k  [0603]  78.45,43.72 180 bottom
R39  470k  [0603]  86.07,40.92 0 bottom
R40  10k  [0603]  78.45,39.14 0 bottom
R41  4.7k  [0603]  123.37,40.67 180 bottom
R42  4.7k  [0603]  123.37,43.72 180 bottom
R43  470k  [0603]  130.99,40.92 0 bottom
R44  10k  [0603]  123.37,39.14 0 bottom
R45  4.7k  [0603]  168.29,40.67 180 bottom
R46  4.7k  [0603]  168.29,43.72 180 bottom
R47  470k  [0603]  175.91,40.92 0 bottom
R48  10k  [0603]  168.29,39.14 0 bottom
R49  4.7k  [0603]  33.53,53.89 180 bottom
R50  4.7k  [0603]  33.53,56.94 180 bottom
R51  470k  [0603]  41.15,54.15 0 bottom
R52  10k  [0603]  33.53,52.37 0 bottom
R53  4.7k  [0603]  78.45,53.89 180 bottom
R54  4.7k  [0603]  78.45,56.94 180 bottom
R55  470k  [0603]  86.07,54.15 0 bottom
R56  10k  [0603]  78.45,52.37 0 bottom
R57  4.7k  [0603]  123.37,53.89 180 bottom
R58  4.7k  [0603]  123.37,56.94 180 bottom
R59  470k  [0603]  130.99,54.15 0 bottom
R60  10k  [0603]  123.37,52.37 0 bottom
R61  4.7k  [0603]  168.29,53.89 180 bottom
R62  4.7k  [0603]  168.29,56.94 180 bottom
R63  470k  [0603]  175.91,54.15 0 bottom
R64  10k  [0603]  168.29,52.37 0 bottom
R65  4.7k  [0603]  33.53,67.11 180 bottom
R66  4.7k  [0603]  33.53,70.16 180 bottom
R67  470k  [0603]  41.15,67.37 0 bottom
R68  10k  [0603]  33.53,65.59 0 bottom
R69  4.7k  [0603]  78.45,67.11 180 bottom
R70  4.7k  [0603]  78.45,70.16 180 bottom
R71  470k  [0603]  86.07,67.37 0 bottom
R72  10k  [0603]  78.45,65.59 0 bottom
R73  4.7k  [0603]  123.37,67.11 180 bottom
R74  4.7k  [0603]  123.37,70.16 180 bottom
R75  470k  [0603]  130.99,67.37 0 bottom
R76  10k  [0603]  123.37,65.59 0 bottom
R77  4.7k  [0603]  168.29,67.11 180 bottom
R78  4.7k  [0603]  168.29,70.16 180 bottom
R79  470k  [0603]  175.91,67.37 0 bottom
R80  10k  [0603]  168.29,65.59 0 bottom
R81  4.7k  [0603]  33.53,80.34 180 bottom
R82  4.7k  [0603]  33.53,83.38 180 bottom
R83  470k  [0603]  41.15,80.59 0 bottom
R84  10k  [0603]  33.53,78.81 0 bottom
R85  4.7k  [0603]  78.45,80.34 180 bottom
R86  4.7k  [0603]  78.45,83.38 180 bottom
R87  470k  [0603]  86.07,80.59 0 bottom
R88  10k  [0603]  78.45,78.81 0 bottom
R89  4.7k  [0603]  123.37,80.34 180 bottom
R90  4.7k  [0603]  123.37,83.38 180 bottom
R91  470k  [0603]  130.99,80.59 0 bottom
R92  10k  [0603]  123.37,78.81 0 bottom
R93  4.7k  [0603]  168.29,80.34 180 bottom
R94  4.7k  [0603]  168.29,83.38 180 bottom
R95  470k  [0603]  175.91,80.59 0 bottom
R96  10k  [0603]  168.29,78.81 0 bottom
R97  4.7k  [0603]  33.53,93.56 180 bottom
R98  4.7k  [0603]  33.53,96.6 180 bottom
R99  470k  [0603]  41.15,93.81 0 bottom
R100  10k  [0603]  33.53,92.03 0 bottom
R101  4.7k  [0603]  78.45,93.56 180 bottom
R102  4.7k  [0603]  78.45,96.6 180 bottom
R103  470k  [0603]  86.07,93.81 0 bottom
R104  10k  [0603]  78.45,92.03 0 bottom
R105  4.7k  [0603]  123.37,93.56 180 bottom
R106  4.7k  [0603]  123.37,96.6 180 bottom
R107  470k  [0603]  130.99,93.81 0 bottom
R108  10k  [0603]  123.37,92.03 0 bottom
R109  4.7k  [0603]  168.29,93.56 180 bottom
R110  4.7k  [0603]  168.29,96.6 180 bottom
R111  470k  [0603]  175.91,93.81 0 bottom
R112  10k  [0603]  168.29,92.03 0 bottom
R113  4.7k  [0603]  33.53,106.78 180 bottom
R114  4.7k  [0603]  33.53,109.83 180 bottom
R115  470k  [0603]  41.15,107.03 0 bottom
R116  10k  [0603]  33.53,105.26 0 bottom
R117  4.7k  [0603]  78.45,106.78 180 bottom
R118  4.7k  [0603]  78.45,109.83 180 bottom
R119  470k  [0603]  86.07,107.03 0 bottom
R120  10k  [0603]  78.45,105.26 0 bottom
R121  4.7k  [0603]  123.37,106.78 180 bottom
R122  4.7k  [0603]  123.37,109.83 180 bottom
R123  470k  [0603]  130.99,107.03 0 bottom
R124  10k  [0603]  123.37,105.26 0 bottom
R125  4.7k  [0603]  168.29,106.78 180 bottom
R126  4.7k  [0603]  168.29,109.83 180 bottom
R127  470k  [0603]  175.91,107.03 0 bottom
R128  10k  [0603]  168.29,105.26 0 bottom
R129  4.7k  [0603]  33.53,120 180 bottom
R130  4.7k  [0603]  33.53,123.05 180 bottom
R131  470k  [0603]  41.15,120.25 0 bottom
R132  10k  [0603]  33.53,118.48 0 bottom
R133  4.7k  [0603]  78.45,120 180 bottom
R134  4.7k  [0603]  78.45,123.05 180 bottom
R135  470k  [0603]  86.07,120.25 0 bottom
R136  10k  [0603]  78.45,118.48 0 bottom
R137  4.7k  [0603]  123.37,120 180 bottom
R138  4.7k  [0603]  123.37,123.05 180 bottom
R139  470k  [0603]  130.99,120.25 0 bottom
R140  10k  [0603]  123.37,118.48 0 bottom
R141  4.7k  [0603]  168.29,120 180 bottom
R142  4.7k  [0603]  168.29,123.05 180 bottom
R143  470k  [0603]  175.91,120.25 0 bottom
R144  10k  [0603]  168.29,118.48 0 bottom
TP1  TEST-POINT3X4  [PAD.03X.04]  18.29,13.21 0 bottom
TP2  TEST-POINT3X4  [PAD.03X.04]  18.29,15.75 0 bottom
TP3  TEST-POINT3X4  [PAD.03X.04]  18.29,10.67 0 bottom
TP4  TEST-POINT3X4  [PAD.03X.04]  18.29,8.13 0 bottom
TP5  TEST-POINT3X4  [PAD.03X.04]  63.21,13.21 0 bottom
TP6  TEST-POINT3X4  [PAD.03X.04]  63.21,15.75 0 bottom
TP7  TEST-POINT3X4  [PAD.03X.04]  63.21,10.67 0 bottom
TP8  TEST-POINT3X4  [PAD.03X.04]  63.21,8.13 0 bottom
TP9  TEST-POINT3X4  [PAD.03X.04]  108.13,13.21 0 bottom
TP10  TEST-POINT3X4  [PAD.03X.04]  108.13,15.75 0 bottom
TP11  TEST-POINT3X4  [PAD.03X.04]  108.13,10.67 0 bottom
TP12  TEST-POINT3X4  [PAD.03X.04]  108.13,8.13 0 bottom
TP13  TEST-POINT3X4  [PAD.03X.04]  153.05,13.21 0 bottom
TP14  TEST-POINT3X4  [PAD.03X.04]  153.05,15.75 0 bottom
TP15  TEST-POINT3X4  [PAD.03X.04]  153.05,10.67 0 bottom
TP16  TEST-POINT3X4  [PAD.03X.04]  153.05,8.13 0 bottom
TP17  TEST-POINT3X4  [PAD.03X.04]  18.29,26.43 0 bottom
TP18  TEST-POINT3X4  [PAD.03X.04]  18.29,28.97 0 bottom
TP19  TEST-POINT3X4  [PAD.03X.04]  18.29,23.89 0 bottom
TP20  TEST-POINT3X4  [PAD.03X.04]  18.29,21.35 0 bottom
TP21  TEST-POINT3X4  [PAD.03X.04]  63.21,26.43 0 bottom
TP22  TEST-POINT3X4  [PAD.03X.04]  63.21,28.97 0 bottom
TP23  TEST-POINT3X4  [PAD.03X.04]  63.21,23.89 0 bottom
TP24  TEST-POINT3X4  [PAD.03X.04]  63.21,21.35 0 bottom
TP25  TEST-POINT3X4  [PAD.03X.04]  108.13,26.43 0 bottom
TP26  TEST-POINT3X4  [PAD.03X.04]  108.13,28.97 0 bottom
TP27  TEST-POINT3X4  [PAD.03X.04]  108.13,23.89 0 bottom
TP28  TEST-POINT3X4  [PAD.03X.04]  108.13,21.35 0 bottom
TP29  TEST-POINT3X4  [PAD.03X.04]  153.05,26.43 0 bottom
TP30  TEST-POINT3X4  [PAD.03X.04]  153.05,28.97 0 bottom
TP31  TEST-POINT3X4  [PAD.03X.04]  153.05,23.89 0 bottom
TP32  TEST-POINT3X4  [PAD.03X.04]  153.05,21.35 0 bottom
TP33  TEST-POINT3X4  [PAD.03X.04]  18.29,39.65 0 bottom
TP34  TEST-POINT3X4  [PAD.03X.04]  18.29,42.19 0 bottom
TP35  TEST-POINT3X4  [PAD.03X.04]  18.29,37.11 0 bottom
TP36  TEST-POINT3X4  [PAD.03X.04]  18.29,34.57 0 bottom
TP37  TEST-POINT3X4  [PAD.03X.04]  63.21,39.65 0 bottom
TP38  TEST-POINT3X4  [PAD.03X.04]  63.21,42.19 0 bottom
TP39  TEST-POINT3X4  [PAD.03X.04]  63.21,37.11 0 bottom
TP40  TEST-POINT3X4  [PAD.03X.04]  63.21,34.57 0 bottom
TP41  TEST-POINT3X4  [PAD.03X.04]  108.13,39.65 0 bottom
TP42  TEST-POINT3X4  [PAD.03X.04]  108.13,42.19 0 bottom
TP43  TEST-POINT3X4  [PAD.03X.04]  108.13,37.11 0 bottom
TP44  TEST-POINT3X4  [PAD.03X.04]  108.13,34.57 0 bottom
TP45  TEST-POINT3X4  [PAD.03X.04]  153.05,39.65 0 bottom
TP46  TEST-POINT3X4  [PAD.03X.04]  153.05,42.19 0 bottom
TP47  TEST-POINT3X4  [PAD.03X.04]  153.05,37.11 0 bottom
TP48  TEST-POINT3X4  [PAD.03X.04]  153.05,34.57 0 bottom
TP49  TEST-POINT3X4  [PAD.03X.04]  18.29,52.88 0 bottom
TP50  TEST-POINT3X4  [PAD.03X.04]  18.29,55.42 0 bottom
TP51  TEST-POINT3X4  [PAD.03X.04]  18.29,50.34 0 bottom
TP52  TEST-POINT3X4  [PAD.03X.04]  18.29,47.8 0 bottom
TP53  TEST-POINT3X4  [PAD.03X.04]  63.21,52.88 0 bottom
TP54  TEST-POINT3X4  [PAD.03X.04]  63.21,55.42 0 bottom
TP55  TEST-POINT3X4  [PAD.03X.04]  63.21,50.34 0 bottom
TP56  TEST-POINT3X4  [PAD.03X.04]  63.21,47.8 0 bottom
TP57  TEST-POINT3X4  [PAD.03X.04]  108.13,52.88 0 bottom
TP58  TEST-POINT3X4  [PAD.03X.04]  108.13,55.42 0 bottom
TP59  TEST-POINT3X4  [PAD.03X.04]  108.13,50.34 0 bottom
TP60  TEST-POINT3X4  [PAD.03X.04]  108.13,47.8 0 bottom
TP61  TEST-POINT3X4  [PAD.03X.04]  153.05,52.88 0 bottom
TP62  TEST-POINT3X4  [PAD.03X.04]  153.05,55.42 0 bottom
TP63  TEST-POINT3X4  [PAD.03X.04]  153.05,50.34 0 bottom
TP64  TEST-POINT3X4  [PAD.03X.04]  153.05,47.8 0 bottom
TP65  TEST-POINT3X4  [PAD.03X.04]  18.29,66.1 0 bottom
TP66  TEST-POINT3X4  [PAD.03X.04]  18.29,68.64 0 bottom
TP67  TEST-POINT3X4  [PAD.03X.04]  18.29,63.56 0 bottom
TP68  TEST-POINT3X4  [PAD.03X.04]  18.29,61.02 0 bottom
TP69  TEST-POINT3X4  [PAD.03X.04]  63.21,66.1 0 bottom
TP70  TEST-POINT3X4  [PAD.03X.04]  63.21,68.64 0 bottom
TP71  TEST-POINT3X4  [PAD.03X.04]  63.21,63.56 0 bottom
TP72  TEST-POINT3X4  [PAD.03X.04]  63.21,61.02 0 bottom
TP73  TEST-POINT3X4  [PAD.03X.04]  108.13,66.1 0 bottom
TP74  TEST-POINT3X4  [PAD.03X.04]  108.13,68.64 0 bottom
TP75  TEST-POINT3X4  [PAD.03X.04]  108.13,63.56 0 bottom
TP76  TEST-POINT3X4  [PAD.03X.04]  108.13,61.02 0 bottom
TP77  TEST-POINT3X4  [PAD.03X.04]  153.05,66.1 0 bottom
TP78  TEST-POINT3X4  [PAD.03X.04]  153.05,68.64 0 bottom
TP79  TEST-POINT3X4  [PAD.03X.04]  153.05,63.56 0 bottom
TP80  TEST-POINT3X4  [PAD.03X.04]  153.05,61.02 0 bottom
TP81  TEST-POINT3X4  [PAD.03X.04]  18.29,79.32 0 bottom
TP82  TEST-POINT3X4  [PAD.03X.04]  18.29,81.86 0 bottom
TP83  TEST-POINT3X4  [PAD.03X.04]  18.29,76.78 0 bottom
TP84  TEST-POINT3X4  [PAD.03X.04]  18.29,74.24 0 bottom
TP85  TEST-POINT3X4  [PAD.03X.04]  63.21,79.32 0 bottom
TP86  TEST-POINT3X4  [PAD.03X.04]  63.21,81.86 0 bottom
TP87  TEST-POINT3X4  [PAD.03X.04]  63.21,76.78 0 bottom
TP88  TEST-POINT3X4  [PAD.03X.04]  63.21,74.24 0 bottom